# EAGLE board QuadFCv1 (EAGLE 6.4)
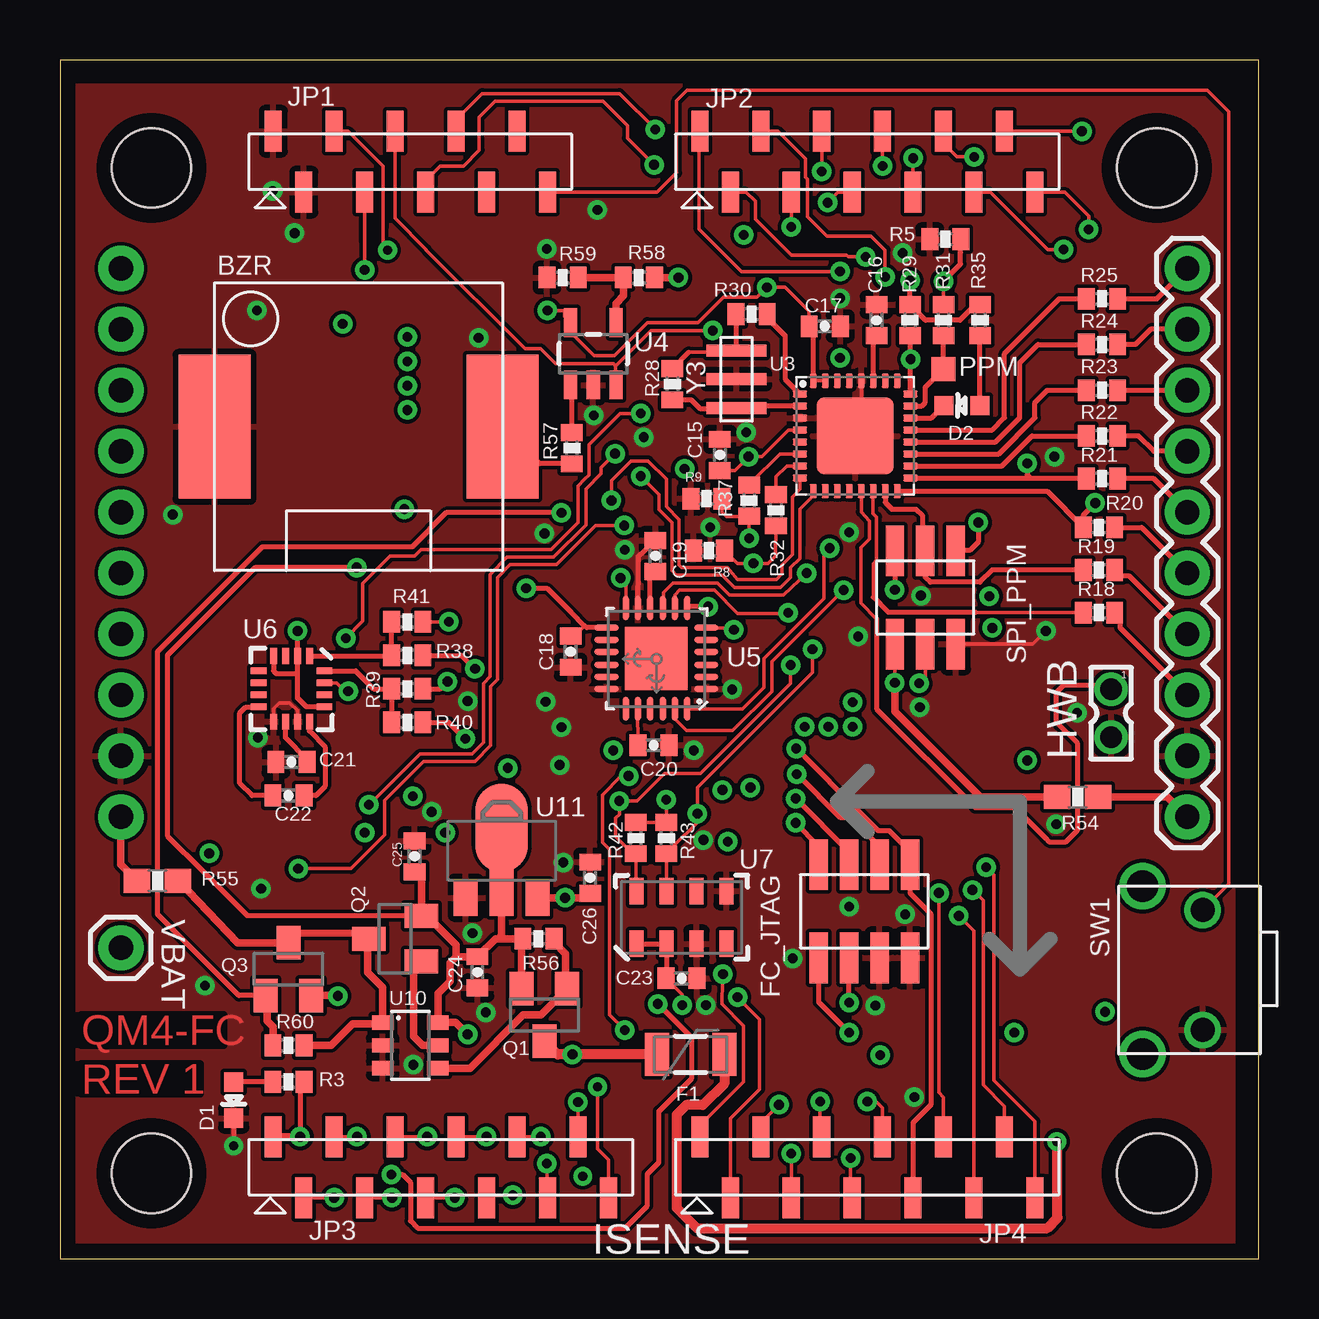
[diagram p0: board, top side]
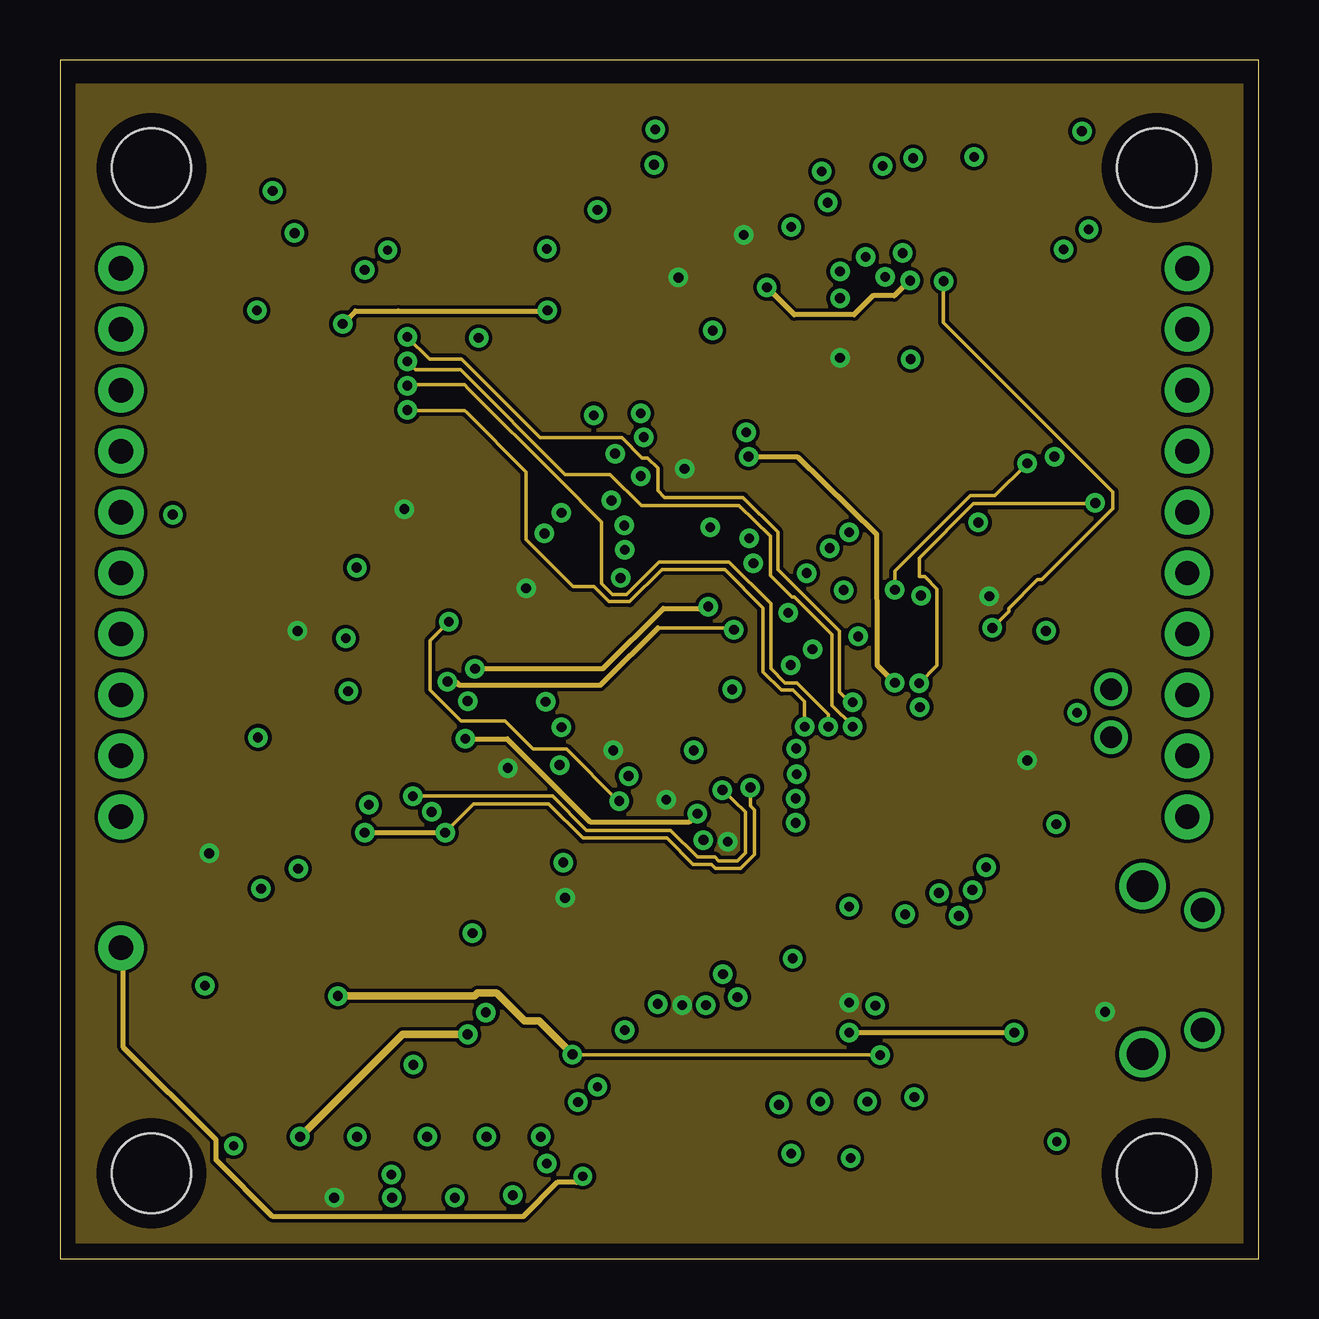
[diagram p1: board, inner layer VCC]
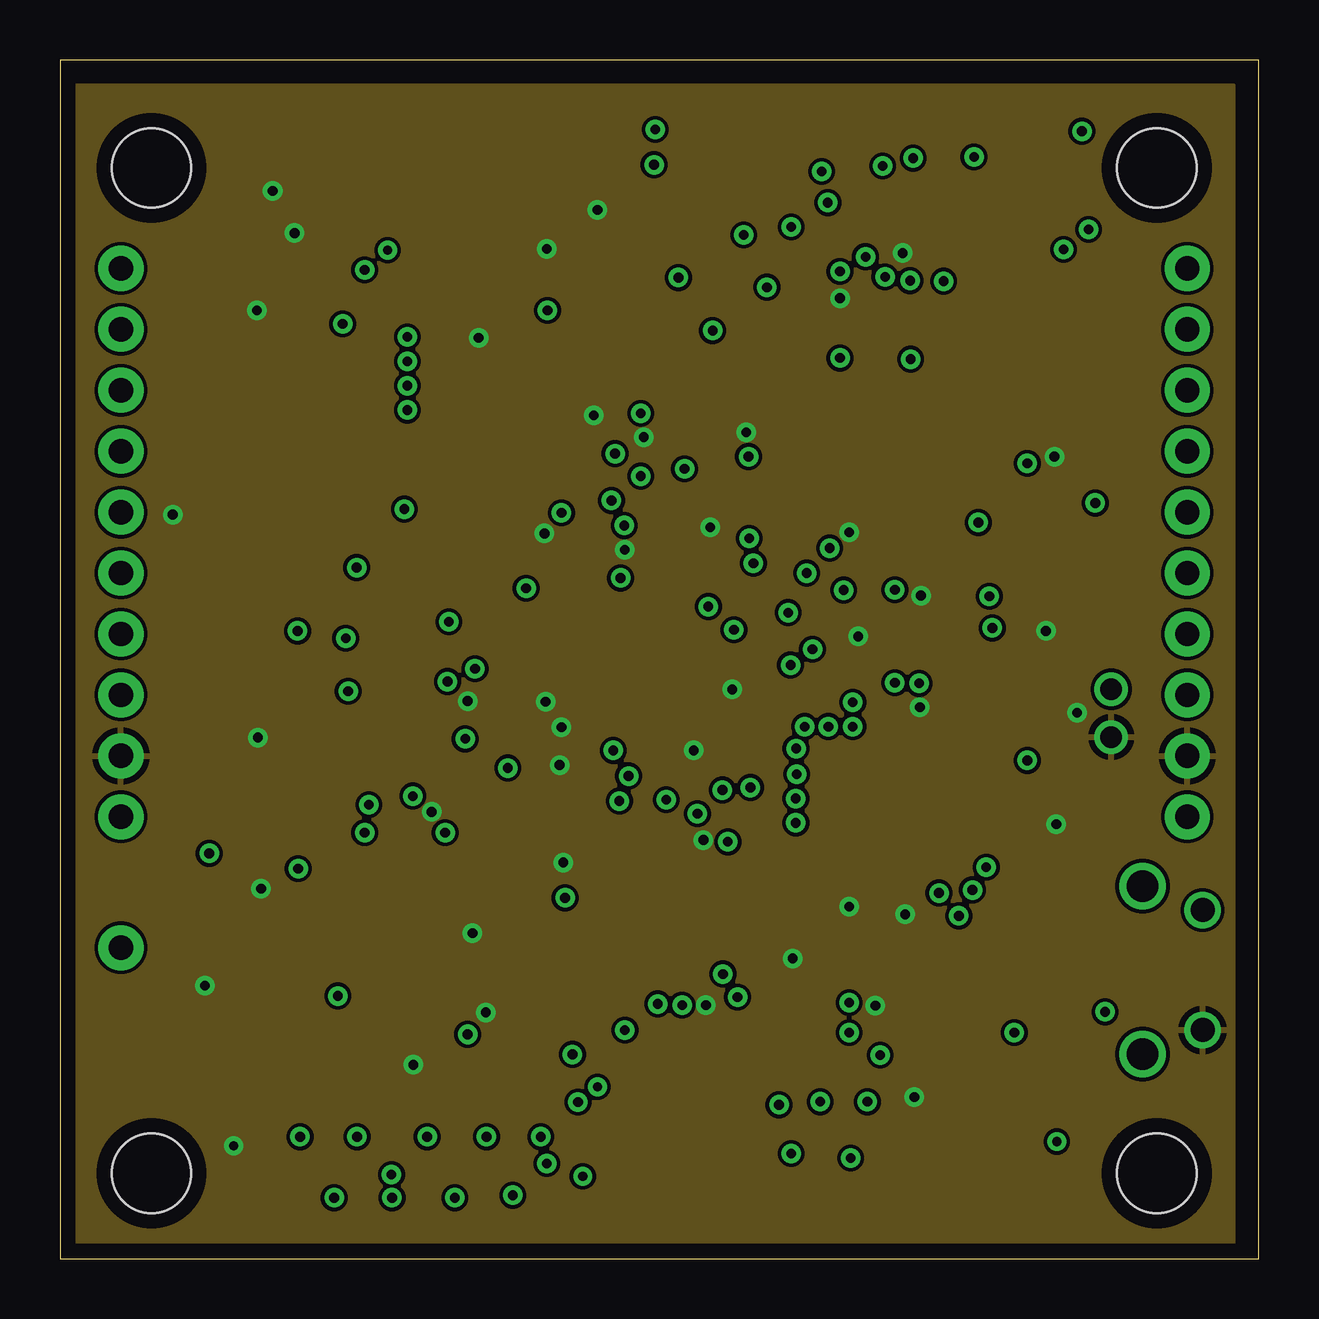
[diagram p2: board, inner layer GND]
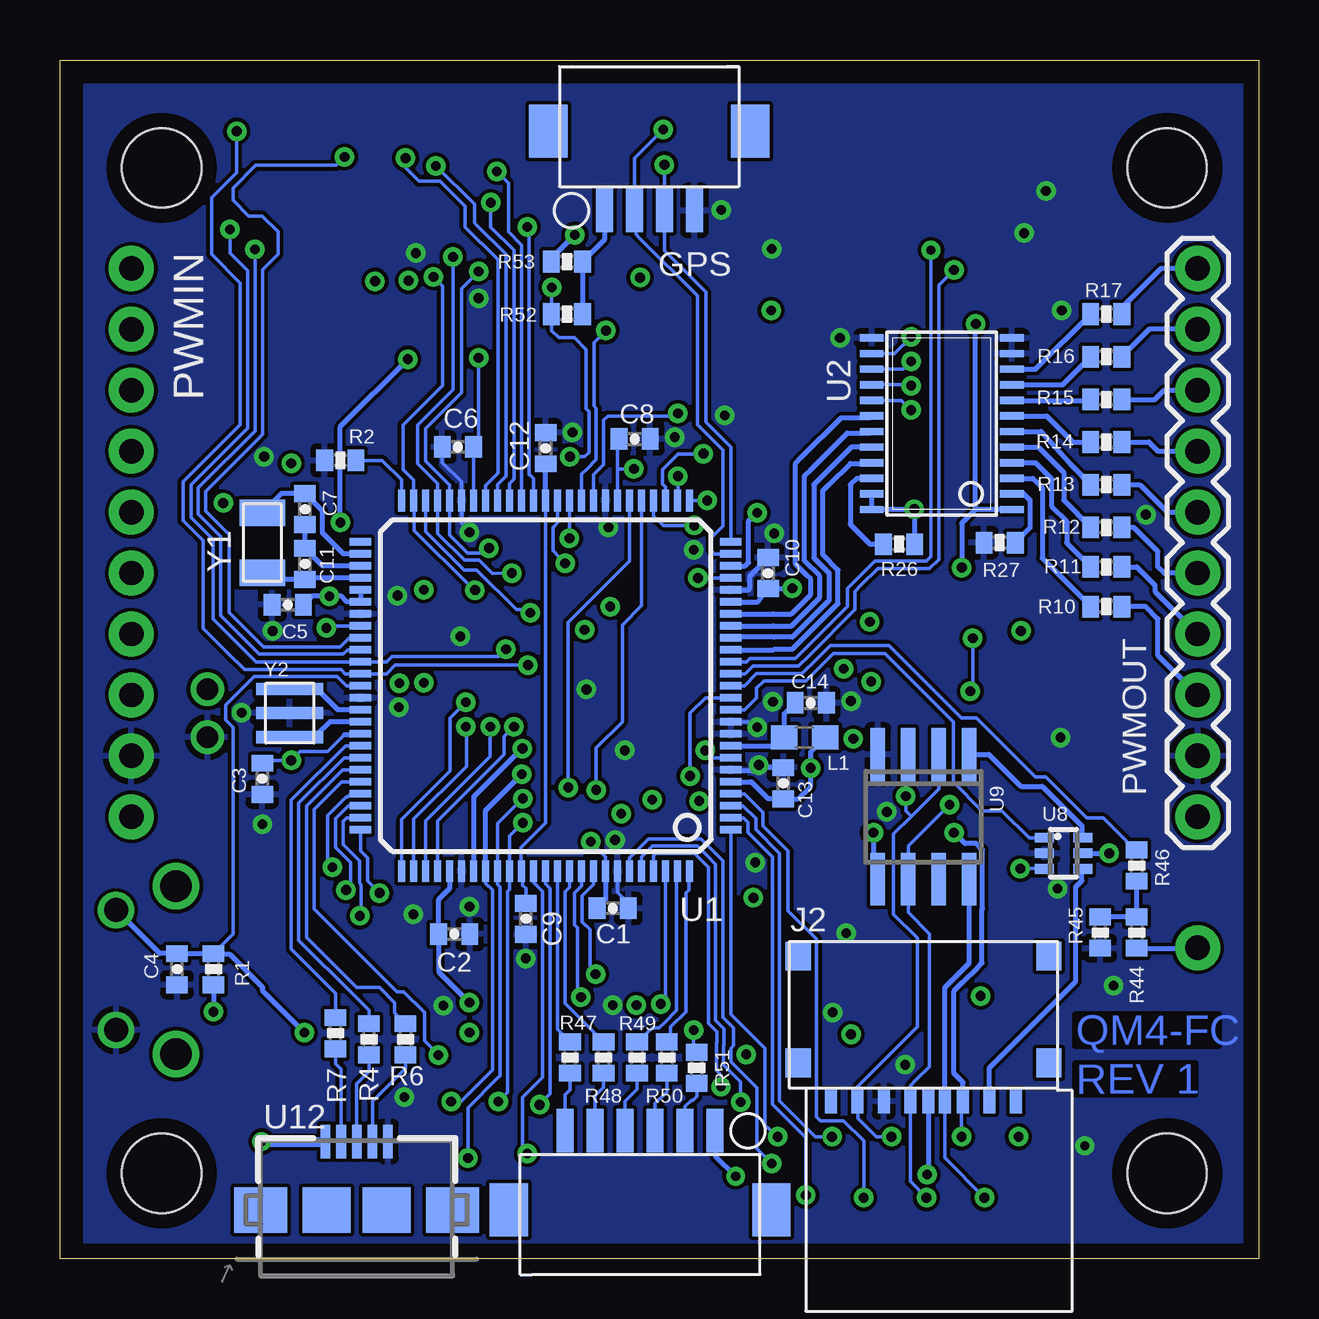
[diagram p3: board, bottom side, seen from below]

Size 49.96 x 49.96 mm. Coordinates in mm from the lower left corner, seen from the top.
Outline: 0,0 49.96,0 49.96,49.96 0,49.96 0,0
Copper layers (1*2+15*16): Top 0.035mm / dielectric 0.5mm / VCC 0.035mm / dielectric 0.5mm / GND 0.035mm / dielectric 0.5mm / Bottom 0.035mm
Design rules "default *": minimum track width 6mil, minimum drill 15mil, track to track 6mil, track to pad 6mil, pad to pad 6mil, via to via 6mil, smd to smd 6mil, copper to edge 25mil, drill to drill 5mil, minimum pad ring 10mil, minimum via ring 8mil, stop-mask expansion 4mil, vias tented up to drill 16mil, thermal gap 10mil
Net classes: 0 default: width 0.152 mm, clearance 0.152 mm

## Footprints (pad centres in the part's own frame; a part is rotated, then mirrored left to right if it is on the bottom)
CMT-1203-SMT = smd 6 x 3: P$1 0,-6; P$2 0,6
0402-CAP = smd 0.7 x 0.9: 1 -0.65,0; 2 0.65,0
LED-0603 = smd 0.8 x 0.8: A 0,-0.75; C 0,0.75
PTC-1206 = smd 1 x 1.8: 1 -1.4,0; 2 1.4,0
2X4_SMT-0.05 = smd 0.762 x 2.108: 1 -1.27,1.943; 2 -1.27,-1.943; 3 0,1.943; 4 0,-1.943; 5 1.27,1.943; 6 1.27,-1.943; 7 2.54,1.943; 8 2.54,-1.943
DF13A-4P-1.25H = smd 0.7 x 1.8: P1 -1.865,0; P2 -0.615,0; P3 0.635,0; P4 1.885,0 | smd 1.6 x 2.2: PAD@1 -4.215,3.3; PAD@2 4.215,3.3
87758-0216 = drill 0.9 pad 1.27: 1 0,-1; 2 0,1
DF13A-6P-1.25H = smd 0.7 x 1.8: P1 -3.125,0; P2 -1.875,0; P3 -0.625,0; P4 0.625,0; P5 1.875,0; P6 3.125,0 | smd 1.6 x 2.2: PAD@1 -5.475,3.3; PAD@2 5.475,3.3
1050270001 = smd 0.5 x 1: G1 0.2,-6.66; P1 3.85,-6.66; P2 2.75,-6.66; P3 1.65,-6.66; P4 0.9,-6.66; P5 -0.55,-6.66; P6 -1.65,-6.66; P7 -2.75,-6.66; P8 -3.85,-6.66 | smd 1.05 x 1.2: GND@1 -5.225,-5.05; GND@2 -5.225,-0.6; GND@3 5.225,-0.6; GND@4 5.225,-5.05
1X10_SMT-0.05 = smd 0.711 x 1.702: 1 0,1.27; 2 1.27,-1.27; 3 2.54,1.27; 4 3.81,-1.27; 5 5.08,1.27; 6 6.35,-1.27; 7 7.62,1.27; 8 8.89,-1.27; 9 10.16,1.27; 10 11.43,-1.27
1X12_SMT-0.05 = smd 0.711 x 1.702: 1 0,1.27; 2 1.27,-1.27; 3 2.54,1.27; 4 3.81,-1.27; 5 5.08,1.27; 6 6.35,-1.27; 7 7.62,1.27; 8 8.89,-1.27; 9 10.16,1.27; 10 11.43,-1.27; 11 12.7,1.27; 12 13.97,-1.27
0603 = smd 1.1 x 1: 1 -0.85,0; 2 0.85,0
TP10SQ = smd 1 x 1: TP 0,0
1X10 = drill 1.016 pad 1.88: 1 0,0; 2 2.54,0; 3 5.08,0; 4 7.62,0; 5 10.16,0; 6 12.7,0; 7 15.24,0; 8 17.78,0; 9 20.32,0; 10 22.86,0
SOT23 = smd 1 x 1.4: 1 -0.95,-1.1; 2 0.95,-1.1; 3 0,1.1
0402-RES = smd 0.7 x 0.9: 1 -0.65,0; 2 0.65,0
0603-RES = smd 1.1 x 1: 1 -0.85,0; 2 0.85,0
2X3_SMT-0.05 = smd 0.762 x 2.108: 1 -1.27,1.943; 2 -1.27,-1.943; 3 0,1.943; 4 0,-1.943; 5 1.27,1.943; 6 1.27,-1.943
STAND-OFF = hole 3.302: 0,0
PTS635VL31 = drill 1: 1 0,0; 2 5,0 | drill 1.3: SNAP1 -1,2.5; SNAP2 6,2.5
LQFP100 = smd 0.9 x 0.3: 1 -7.72,6; 2 -7.72,5.5; 3 -7.72,5; 4 -7.72,4.5; 5 -7.72,4; 6 -7.72,3.5; 7 -7.72,3; 8 -7.72,2.5; 9 -7.72,2; 10 -7.72,1.5; 11 -7.72,1; 12 -7.72,0.5; 13 -7.72,0; 14 -7.72,-0.5; 15 -7.72,-1; 16 -7.72,-1.5; 17 -7.72,-2; 18 -7.72,-2.5; 19 -7.72,-3; 20 -7.72,-3.5; 21 -7.72,-4; 22 -7.72,-4.5; 23 -7.72,-5; 24 -7.72,-5.5; 25 -7.72,-6; 51 7.72,-6; 52 7.72,-5.5; 53 7.72,-5; 54 7.72,-4.5; 55 7.72,-4; 56 7.72,-3.5; 57 7.72,-3; 58 7.72,-2.5; 59 7.72,-2; 60 7.72,-1.5; 61 7.72,-1; 62 7.72,-0.5; 63 7.72,0; 64 7.72,0.5; 65 7.72,1; 66 7.72,1.5; 67 7.72,2; 68 7.72,2.5; 69 7.72,3; 70 7.72,3.5; 71 7.72,4; 72 7.72,4.5; 73 7.72,5; 74 7.72,5.5; 75 7.72,6 | smd 0.3 x 0.9: 26 -6,-7.72; 27 -5.5,-7.72; 28 -5,-7.72; 29 -4.5,-7.72; 30 -4,-7.72; 31 -3.5,-7.72; 32 -3,-7.72; 33 -2.5,-7.72; 34 -2,-7.72; 35 -1.5,-7.72; 36 -1,-7.72; 37 -0.5,-7.72; 38 0,-7.72; 39 0.5,-7.72; 40 1,-7.72; 41 1.5,-7.72; 42 2,-7.72; 43 2.5,-7.72; 44 3,-7.72; 45 3.5,-7.72; 46 4,-7.72; 47 4.5,-7.72; 48 5,-7.72; 49 5.5,-7.72; 50 6,-7.72; 76 6,7.72; 77 5.5,7.72; 78 5,7.72; 79 4.5,7.72; 80 4,7.72; 81 3.5,7.72; 82 3,7.72; 83 2.5,7.72; 84 2,7.72; 85 1.5,7.72; 86 1,7.72; 87 0.5,7.72; 88 0,7.72; 89 -0.5,7.72; 90 -1,7.72; 91 -1.5,7.72; 92 -2,7.72; 93 -2.5,7.72; 94 -3,7.72; 95 -3.5,7.72; 96 -4,7.72; 97 -4.5,7.72; 98 -5,7.72; 99 -5.5,7.72; 100 -6,7.72
TSSOP24 = smd 0.305 x 0.991: 1 -3.575,-2.918; 2 -2.925,-2.918; 3 -2.275,-2.918; 4 -1.625,-2.918; 5 -0.975,-2.918; 6 -0.325,-2.918; 7 0.325,-2.918; 8 0.975,-2.918; 9 1.625,-2.918; 10 2.275,-2.918; 11 2.925,-2.918; 12 3.575,-2.918; 13 3.575,2.918; 14 2.925,2.918; 15 2.275,2.918; 16 1.625,2.918; 17 0.975,2.918; 18 0.325,2.918; 19 -0.325,2.918; 20 -0.975,2.918; 21 -1.625,2.918; 22 -2.275,2.918; 23 -2.925,2.918; 24 -3.575,2.918
QFN32 = smd 0.6 x 0.3: 1 -2.3,1.75; 2 -2.3,1.25; 3 -2.3,0.75; 4 -2.3,0.25; 5 -2.3,-0.25; 6 -2.3,-0.75; 7 -2.3,-1.25; 8 -2.3,-1.75; 17 2.3,-1.75; 18 2.3,-1.25; 19 2.3,-0.75; 20 2.3,-0.25; 21 2.3,0.25; 22 2.3,0.75; 23 2.3,1.25; 24 2.3,1.75 | smd 0.3 x 0.6: 9 -1.75,-2.3; 10 -1.25,-2.3; 11 -0.75,-2.3; 12 -0.25,-2.3; 13 0.25,-2.3; 14 0.75,-2.3; 15 1.25,-2.3; 16 1.75,-2.3; 25 1.75,2.3; 26 1.25,2.3; 27 0.75,2.3; 28 0.25,2.3; 29 -0.25,2.3; 30 -0.75,2.3; 31 -1.25,2.3; 32 -1.75,2.3 | smd 3.2 x 3.2: EXP 0,0
SOT23-5 = smd 0.55 x 1.2: 1 -0.95,-1.3; 2 0,-1.3; 3 0.95,-1.3; 4 0.95,1.3; 5 -0.95,1.3
QFN-24-4MM2 = smd 1.016 x 0.254: 1 -2.066,1.257; 2 -2.066,0.75; 3 -2.066,0.247; 4 -2.066,-0.287; 5 -2.066,-0.792; 6 -2.066,-1.297; 13 2.086,-1.297; 14 2.086,-0.792; 15 2.086,-0.287; 16 2.086,0.247; 17 2.086,0.75; 18 2.086,1.257 | smd 0.254 x 1.016: 7 -1.267,-2.122; 8 -0.762,-2.122; 9 -0.258,-2.122; 10 0.278,-2.122; 11 0.78,-2.122; 12 1.287,-2.122; 19 1.287,2.082; 20 0.78,2.082; 21 0.278,2.082; 22 -0.258,2.082; 23 -0.762,2.082; 24 -1.267,2.082 | smd 2.616 x 2.616: P$1 0.02,-0.01
16LPCC = smd 0.65 x 0.28: 1 -1.37,0.75; 2 -1.37,0.25; 3 -1.37,-0.25; 4 -1.37,-0.75; 9 1.37,-0.75; 10 1.37,-0.25; 11 1.37,0.25; 12 1.37,0.75 | smd 0.28 x 0.65: 5 -0.75,-1.37; 6 -0.25,-1.37; 7 0.25,-1.37; 8 0.75,-1.37; 13 0.75,1.37; 14 0.25,1.37; 15 -0.25,1.37; 16 -0.75,1.37
MS5611-01BA = smd 1.1 x 0.6: 1 -1.1,1.875; 2 -1.1,0.625; 3 -1.1,-0.625; 4 -1.1,-1.875; 5 1.1,-1.875; 6 1.1,-0.625; 7 1.1,0.625; 8 1.1,1.875
SOT363_PHILIPS = smd 0.4 x 0.8: 1 -0.65,-0.8; 2 0,-0.8; 3 0.65,-0.8; 4 0.65,0.8; 5 0,0.8; 6 -0.65,0.8
SOIC8 = smd 0.6 x 2.2: 1 -1.905,-2.6; 2 -0.635,-2.6; 3 0.635,-2.6; 4 1.905,-2.6; 5 1.905,2.6; 6 0.635,2.6; 7 -0.635,2.6; 8 -1.905,2.6
SOT23-6 = smd 0.6 x 0.9: 1 -0.95,-1.15; 2 0,-1.15; 3 0.95,-1.15; 4 0.95,1.15; 5 0,1.15; 6 -0.95,1.15
SOT89 = smd 1 x 1.5: 1 -1.499,-1.981; 3 1.499,-1.981 | smd 1 x 2: 2 0,-1.727 | smd 2.2 x 3.7: 2@1 0,0.94
USB-AB-MICRO-SMD = smd 1.4 x 0.4: D+ 2.85,0; D- 2.85,0.65; GND 2.85,-1.3; ID 2.85,-0.65; VBUS 2.85,1.3 | smd 1.9 x 2: P$6 0,1.25; P$7 0,-1.25 | smd 1.9 x 2.2: P$8 0,4; P$9 0,-4
1X01 = drill 1.016 pad 1.88: 1 0,0
ECS-.327-12.5-34B = smd 1.1 x 1.9: P$1 -1.25,0; P$2 1.25,0
AWSCR-CW = smd 0.5 x 2.8: P$1 -1,0; P$2 0,0 | smd 0.511 x 2.8: P$3 1,0
PRQC16.00SR5010X000 = smd 0.5 x 2.5: 1 -1.2,0; 2 0,0; 3 1.2,0

## Placement (x,y rotation side)
BZR  CMT-1203-SMT  [CMT-1203-SMT]  12.45,34.67 90 top
C1  0.1uF  [0402-CAP]  26.92,14.61 0 bottom
C2  0.1uF  [0402-CAP]  33.53,13.53 0 bottom
C3  0.1uF  [0402-CAP]  41.53,20 270 bottom
C4  0.1uF  [0402-CAP]  45.09,12.06 270 bottom
C5  0.1uF  [0402-CAP]  40.46,27.25 180 bottom
C6  0.1uF  [0402-CAP]  33.38,33.83 180 bottom
C7  18pF  [0402-CAP]  39.75,31.24 270 bottom
C8  0.1uF  [0402-CAP]  26.01,34.16 0 bottom
C9  1.8uF  [0402-CAP]  30.54,14.16 270 bottom
C10  0.1uF  [0402-CAP]  20.45,28.57 90 bottom
C11  18pF  [0402-CAP]  39.75,28.96 90 bottom
C12  1.8uF  [0402-CAP]  29.72,33.78 90 bottom
C13  1uF  [0402-CAP]  19.81,19.81 90 bottom
C14  1uF  [0402-CAP]  18.67,23.16 180 bottom
C15  .1uF  [0402-CAP]  27.51,33.5 90 top
C16  1uF  [0402-CAP]  34.04,39.12 90 top
C17  .1uF  [0402-CAP]  31.88,38.86 0 top
C18  0.1uF  [0402-CAP]  21.29,25.3 270 top
C19  0.1uF  [0402-CAP]  24.82,29.29 90 top
C20  2.2nF  [0402-CAP]  24.74,21.4 0 top
C21  4.7uF  [0402-CAP]  9.65,20.7 180 top
C22  0.22uF  [0402-CAP]  9.53,19.3 0 top
C23  0.1uF  [0402-CAP]  25.91,11.68 0 top
C24  1uF  [0402-CAP]  17.4,11.94 90 top
C25  1uF  [0402-CAP]  14.78,16.76 90 top
C26  1uF  [0402-CAP]  22.1,15.88 90 top
D1  GREEN  [LED-0603]  7.24,6.6 180 top
D2  GREEN  [LED-0603]  37.59,35.56 90 top
F1  500mA  [PTC-1206]  26.29,8.51 0 top
FC_JTAG  M04X2SMT-0.05  [2X4_SMT-0.05]  32.89,14.48 0 top
GPS  [DF13A-4P-1.25H]  25.4,43.69 0 bottom
HWB  HWB  [87758-0216]  43.81,22.73 180 top
ISENSE  [DF13A-6P-1.25H]  25.78,5.33 180 bottom
J2  1050270001  [1050270001]  13.97,13.21 0 bottom
JP1  M101X10-SMT-0.05  [1X10_SMT-0.05]  8.89,45.72 0 top
JP2  M12  [1X12_SMT-0.05]  26.67,45.72 0 top
JP3  M12  [1X12_SMT-0.05]  8.89,3.81 0 top
JP4  M12  [1X12_SMT-0.05]  26.67,3.81 0 top
L1  10uH  [0603]  18.92,21.72 0 bottom
PPM  TESTPAD_TPSQTP10SQ  [TP10SQ]  36.83,37.08 90 top
PWMIN  M10"  [1X10]  46.99,18.41 90 top
PWMOUT  M10"  [1X10]  2.54,18.41 90 bottom
Q1  DMP2035U  [SOT23]  20.19,10.16 180 top
Q2  DMP2035U  [SOT23]  13.97,13.34 90 top
Q3  DMP2035U  [SOT23]  9.53,12.06 0 top
R1  10K  [0402-RES]  43.56,12.06 270 bottom
R2  10K  [0402-RES]  38.28,33.27 180 bottom
R3  1k  [0402-RES]  9.53,7.37 180 top
R4  22  [0402-RES]  37.08,9.14 270 bottom
R5  20K  [0402-RES]  36.91,42.49 180 top
R6  0  [0402-RES]  35.56,9.14 270 bottom
R7  22  [0402-RES]  38.48,9.4 270 bottom
R8  20k  [0402-RES]  27.05,29.51 180 top
R9  20k  [0402-RES]  26.95,31.67 0 top
R10  220  [0402-RES]  6.35,27.18 0 bottom
R11  220  [0402-RES]  6.35,28.83 0 bottom
R12  220  [0402-RES]  6.35,30.48 0 bottom
R13  220  [0402-RES]  6.35,32.26 0 bottom
R14  220  [0402-RES]  6.35,34.04 0 bottom
R15  220  [0402-RES]  6.35,35.81 0 bottom
R16  220  [0402-RES]  6.35,37.59 0 bottom
R17  220  [0402-RES]  6.35,39.37 0 bottom
R18  220  [0402-RES]  43.31,26.92 0 top
R19  220  [0402-RES]  43.31,28.7 0 top
R20  220  [0402-RES]  43.31,30.48 0 top
R21  220  [0402-RES]  43.43,32.51 0 top
R22  220  [0402-RES]  43.43,34.29 0 top
R23  220  [0402-RES]  43.43,36.2 0 top
R24  220  [0402-RES]  43.43,38.1 0 top
R25  220  [0402-RES]  43.43,40.01 0 top
R26  49.9K  [0402-RES]  14.99,29.78 0 bottom
R27  10K  [0402-RES]  10.79,29.84 0 bottom
R28  1M  [0402-RES]  25.53,36.45 90 top
R29  10K  [0402-RES]  35.43,39.12 90 top
R30  27  [0402-RES]  28.83,39.37 0 top
R31  10K  [0402-RES]  36.83,39.12 270 top
R32  10k  [0402-RES]  29.84,31.19 90 top
R35  1k  [0402-RES]  38.35,39.12 270 top
R37  10k  [0402-RES]  28.73,31.6 90 top
R38  DNP  [0402-RES]  14.48,25.15 0 top
R39  DNP  [0402-RES]  14.48,23.75 0 top
R40  0  [0402-RES]  14.48,22.35 0 top
R41  0  [0402-RES]  14.48,26.54 0 top
R42  2.2k  [0402-RES]  24,17.53 90 top
R43  2.2k  [0402-RES]  25.27,17.53 90 top
R44  120K  [0402-RES]  5.08,13.59 270 bottom
R45  20K  [0402-RES]  6.6,13.59 90 bottom
R46  10k  [0402-RES]  5.08,16.38 90 bottom
R47  10k  [0402-RES]  28.7,8.38 90 bottom
R48  10k  [0402-RES]  27.3,8.38 90 bottom
R49  10k  [0402-RES]  25.91,8.38 90 bottom
R50  10k  [0402-RES]  24.66,8.38 90 bottom
R51  10k  [0402-RES]  23.42,7.95 90 bottom
R52  0  [0402-RES]  28.83,39.37 180 bottom
R53  DNP  [0402-RES]  28.83,41.55 180 bottom
R54  0  [0603-RES]  42.42,19.24 180 top
R55  0  [0603-RES]  4.06,15.75 0 top
R56  470K  [0402-RES]  19.94,13.34 180 top
R57  0  [0402-RES]  21.34,33.78 270 top
R58  10K  [0402-RES]  24.13,40.89 0 top
R59  10K  [0402-RES]  20.95,40.89 0 top
R60  100k  [0402-RES]  9.53,8.89 0 top
SPI_PPM  SPI_PPM  [2X3_SMT-0.05]  36.07,27.56 0 top
STANDOFF1  STAND-OFF  [STAND-OFF]  3.81,3.56 0 top
STANDOFF2  STAND-OFF  [STAND-OFF]  3.81,45.47 0 top
STANDOFF3  STAND-OFF  [STAND-OFF]  45.72,3.56 0 top
STANDOFF4  STAND-OFF  [STAND-OFF]  45.72,45.47 0 top
SW1  PTS635VL31-VERT  [PTS635VL31]  47.62,9.53 90 top
U1  TM4C123GH6PZ  [LQFP100]  29.72,23.88 180 bottom
U2  74LVC4245APW  [TSSOP24]  13.21,34.8 90 bottom
U3  ATMEGA32U2-MU  [QFN32]  33.15,34.29 0 top
U4  MCP6L91T-E/OT  [SOT23-5]  22.23,37.72 0 top
U5  INVESENSE_MPU-6000  [QFN-24-4MM2]  24.87,25 180 top
U6  HMC5883LSMD  [16LPCC]  9.65,23.75 270 top
U7  MS5611-01BA  [MS5611-01BA]  25.91,14.22 90 top
U8  74AUP1G19GW  [SOT363_PHILIPS]  8.13,16.89 270 bottom
U9  S25FL127S  [SOIC8]  13.97,18.41 180 bottom
U10  LTC4412  [SOT23-6]  14.61,8.89 270 top
U11  AP7215-33YG-13  [SOT89]  18.41,17.02 0 top
U12  [USB-AB-MICRO-SMD]  37.59,2.03 90 bottom
VBATTSENSE  M01PTH  [1X01]  2.54,12.95 90 top
Y1  32.768KHZ  [ECS-.327-12.5-34B]  41.53,29.84 270 bottom
Y2  AWSCR-20.00CW-T  [AWSCR-CW]  40.39,22.73 270 bottom
Y3  PRQC16.00SR5010X000  [PRQC16.00SR5010X000]  28.19,36.65 90 top

## Library data of the parts
BZR C1-C26 D1 D2 F1 FC_JTAG GPS ISENSE J2 JP1-JP4 L1 PPM PWMIN PWMOUT Q1-Q3 R1-R32 R35 R37-R60 SPI_PPM STANDOFF1-STANDOFF4 SW1 U1-U6 U8-U12 VBATTSENSE Y1-Y3 = QuadFCv1
HWB = QuadFCv1; MPN: 87758-0216; OC_FARNELL: unknown; OC_NEWARK: 94M1513
U7 = QuadFCv1; DATASHEET: http://www.meas-spec.com/downloads/MS5611-01BA01.pdf; LINK: http://www.meas-spec.com/product/t_product.aspx?id=8503#; MFGPN: MS5611-01BA

## Nets
3.3V: C1.1 C2.1 C3.1 C5.1 C6.1 C8.1 C10.1 C13.1 C18.1 C23.1 C26.1 FC_JTAG.4 J2.P4 JP3.2 L1.2 R1.2 R26.2 R42.2 R43.2 R53.2 R58.2 U1.5 U1.7 U1.20 U1.32 U1.44 U1.55 U1.56 U1.67 U1.80 U1.93 U2.23 U2.24 U5.13 U6.2 U6.4 U6.13 U7.1 U7.2 U8.5 U9.8 U11.3
5V: C15.1 C17.1 C24.2 C25.1 JP3.1 Q1.2 Q2.2 R3.1 R29.2 R35.1 R52.2 R54.2 R56.2 SPI_PPM.2 U2.1 U3.4 U3.31 U3.32 U4.5 U10.6 U11.2 U11.2@1
5VBATT: Q2.3 Q3.3 R55.2 R60.2 U10.1
AUX_SCL: R38.2 U5.7
AUX_SDA: R39.2 U5.6
BUZZER_PWM: JP1.5 U1.35 U4.3
FC_IMU_CS_L: U1.48 U5.8
FC_IMU_INT: U1.22 U5.12
FC_IMU_MISO: JP2.2 U1.47 U5.9
FC_IMU_MOSI: JP2.1 U1.46 U5.24
FC_IMU_SCLK: JP2.3 U1.49 U5.23
FC_JTAG_TCK: FC_JTAG.1 JP4.5 U1.85
FC_JTAG_TDI: FC_JTAG.5 JP4.7 U1.83
FC_JTAG_TDO: FC_JTAG.7 JP4.8 U1.82
FC_JTAG_TMS: FC_JTAG.3 JP4.6 U1.84
FC_MAG_DRDY_L: U1.34 U6.15
FC_MEM_CLK: J2.P5 JP3.4 U1.28 U9.6
FC_MEM_FSS: U1.29 U8.3
FC_MEM_MISO: J2.P7 JP3.5 U1.30 U9.2
FC_MEM_MOSI: J2.P3 JP3.3 U1.31 U9.5
FC_MEM_SEL: U1.11 U8.1
FC_PB2: JP4.12 U1.72
FC_PB3: JP4.11 U1.73
FC_PB4: JP4.1 U1.92
FC_PB5: JP4.2 U1.91
FC_PD0: JP3.9 U1.1
FC_PD1: JP3.8 U1.2
FC_PD2: JP3.7 U1.3
FC_PD3: JP3.6 U1.4
FC_PD4: JP3.12 U1.97
FC_PE4: JP3.10 U1.95
FC_PE5: JP3.11 U1.96
FC_PF0: JP2.5 U1.40
FC_PF1: JP2.6 U1.41
FC_PF2: JP2.7 U1.42
FC_PF3: JP2.8 U1.43
FC_PF4: JP2.4 U1.39
FC_PG2: JP2.10 U1.60
FC_PG3: JP2.9 U1.59
FC_PG4: JP4.10 U1.74
FC_PG5: JP4.9 U1.75
FC_PG6: JP4.4 U1.87
FC_PG7: JP4.3 U1.88
FC_PPM_IN: R5.1 R31.1 U1.58
FC_PPM_STATUS0: R9.2 R37.1 U1.36
FC_PPM_STATUS1: R8.1 R32.1 U1.37
FC_PWMOUT1: U1.16 U2.21
FC_PWMOUT2: U1.17 U2.20
FC_PWMOUT3: U1.18 U2.19
FC_PWMOUT4: U1.19 U2.18
FC_PWMOUT5: U1.79 U2.17
FC_PWMOUT6: U1.78 U2.16
FC_PWMOUT7: U1.77 U2.15
FC_PWMOUT8: U1.76 U2.14
FC_PWMOUT_ARM_L: R26.1 U2.22
FC_RESET_L: C4.1 FC_JTAG.2 JP1.10 R1.1 SW1.2 U1.63
FC_SD_PRESENT: J2.G1 U1.98
FC_SENSE_SCL: JP2.11 R41.2 R42.1 U1.62 U7.8
FC_SENSE_SDA: JP2.12 R40.2 R43.1 U1.61 U7.7
FC_USB0DM: R7.1 U1.68
FC_USB0DP: R4.1 U1.69
FC_USB0ID: R6.1 U1.70
FLASH_CS_L: U8.6 U9.1
GND: BZR.P$2 C1.2 C2.2 C3.2 C4.2 C5.2 C6.2 C8.2 C9.2 C10.2 C12.2 C13.2 C14.1 C15.2 C16.2 C17.2 C18.2 C19.2 C20.2 C21.2 C23.2 C24.1 C25.2 C26.2 D1.C FC_JTAG.6 FC_JTAG.8 GPS.P4 HWB.2 J2.P6 JP1.1 JP1.2 PWMIN.2 PWMOUT.2 R2.2 R5.2 R8.2 R9.1 R27.1 R45.1 R59.1 SPI_PPM.6 SW1.1 U1.6 U1.9 U1.10 U1.21 U1.33 U1.45 U1.57 U1.64 U1.81 U1.94 U2.11 U2.12 U2.13 U3.3 U3.28 U3.EXP U4.2 U5.1 U5.11 U5.18 U6.9 U6.11 U7.3 U7.5 U8.2 U9.4 U10.2 U10.3 U11.1 U12.GND Y2.P$2 Y3.2
GNDX: C7.2 C11.2 U1.53
GPS_RX: GPS.P3 JP1.6 U1.25
GPS_TX: GPS.P2 JP1.7 U1.24
ISENSE1: R48.2 U1.90
ISENSE2: R47.2 U1.89
ISENSE3: R51.2 U1.12
ISENSE4: R50.2 U1.100
ISENSE5V: R49.2 U1.99
MAG_SCL: R38.1 R41.1 U6.1
MAG_SDA: R39.1 R40.1 U6.16
N$1: PWMIN.3 R18.2
N$2: PWMIN.4 R19.2
N$3: PWMIN.5 R20.2
N$4: PWMIN.6 R21.2
N$5: PWMIN.7 R22.2
N$6: PWMIN.8 R23.2
N$7: PWMIN.9 R24.2
N$8: PWMIN.10 R25.2
N$9: PWMOUT.3 R10.2
N$10: PWMOUT.4 R11.2
N$11: PWMOUT.5 R12.2
N$12: PWMOUT.6 R13.2
N$13: PWMOUT.7 R14.2
N$14: PWMOUT.8 R15.2
N$15: PWMOUT.9 R16.2
N$16: PWMOUT.10 R17.2
N$17: C14.2 L1.1 U1.8
N$18: C9.1 C12.1 U1.38 U1.86
N$19: C11.1 U1.54 Y1.P$2
N$20: R27.2 U2.2
N$21: C7.1 U1.52 Y1.P$1
N$22: R2.1 U1.50
N$23: PWMIN.1 R54.1
N$24: U1.65 Y2.P$1
N$25: U1.66 Y2.P$3
N$26: PWMOUT.1 R55.1
N$27: R6.2 U12.ID
N$28: D1.A R3.2
N$29: R4.2 U12.D+
N$30: ISENSE.P6 R47.1
N$31: ISENSE.P5 R48.1
N$32: D2.A R35.2
N$33: C20.1 U5.20
N$34: C19.1 U5.10
N$35: C21.1 U6.10
N$36: C22.1 U6.8
N$37: C22.2 U6.12
N$38: R44.1 R45.2 R46.1
N$39: GPS.P1 R52.1 R53.1
N$40: R57.1 U4.1
N$41: Q2.1 U10.5
N$42: BZR.P$1 R57.2
N$43: R58.1 R59.2 U4.4
N$44: ISENSE.P4 R49.1
N$45: ISENSE.P3 R50.1
N$46: ISENSE.P2 R51.1
N$49: R7.2 U12.D-
PC7_LED: D2.C U3.22
PPM_HWB: HWB.1 U3.13
PPM_OUT: PPM.TP R31.2 U3.23
PPM_PD0: R37.2 U3.6
PPM_PD1: R32.2 U3.7
PPM_RST: R29.1 SPI_PPM.5 U3.24
PPM_RX: U1.26 U3.8
PPM_TX: U1.27 U3.9
PWMIN1: R18.1 U3.14
PWMIN2: R19.1 SPI_PPM.3 U3.15
PWMIN3: R20.1 SPI_PPM.4 U3.16
PWMIN4: R21.1 SPI_PPM.1 U3.17
PWMIN5: R22.1 U3.18
PWMIN6: R23.1 U3.19
PWMIN7: R24.1 U3.20
PWMIN8: R25.1 U3.21
PWMOUT1: R10.1 U2.3
PWMOUT2: R11.1 U2.4
PWMOUT3: R12.1 U2.5
PWMOUT4: R13.1 U2.6
PWMOUT5: R14.1 U2.7
PWMOUT6: R15.1 U2.8
PWMOUT7: R16.1 U2.9
PWMOUT8: R17.1 U2.10
RADIO_RX: JP1.3 U1.15
RADIO_TX: JP1.4 U1.14
SD_CS_L: J2.P2 U8.4
USB_EPEN: Q3.1 R60.1 U1.23
USB_POWER_CONN_L: Q1.1 R56.1 U10.4
VBATT: ISENSE.P1 R44.2 VBATTSENSE.1
VBATTSENSE: R46.2 U1.13
VUCAP: C16.1 U3.27
VUSB: F1.2 U12.VBUS
VUSB_F: F1.1 Q1.3 Q3.2 U1.71
XT1: R28.2 R30.1 Y3.3
XT1R: R30.2 U3.1
XT2: R28.1 U3.2 Y3.1

## Tracks (layer width: path | path; a pad name or v marks a point on that pad's centre or on a via)
3.3V  (via drill 0.41)
  Top 0.152: JP3.2 v11.43,2.54 | v25.93,10.57 25.93,11.01 C23.1 | R42.2 R43.2 v25.27,19.13 | C18.1 21.45,25.95 21.88,26.37
  Top 0.203: U5.13 21.95,26.3 21.88,26.37 21.32,26.93 20.32,27.93 19.45,27.93 v19.43,27.94 | v32.89,10.67 FC_JTAG.4 | 21.91,15.04 C26.1 | U6.13 10.28,23 9.91,23.37 9.91,24.38 | 9.91,24.38 U6.2 v9.9,26.16 v9.91,26.16 | U6.4 8.9,24.5 9.02,24.38 9.91,24.38 | v21.06,15.04 21.16,14.99 21.21,15.04 | U7.1 U7.2 25.28,12.34 C23.1
  Top 0.305: R58.2 v25.78,40.89 | U11.3 21.21,15.04 21.91,15.04
  Bottom 0.152: v11.43,2.54 13.08,4.19 13.08,6.54 J2.P4 | 38.1,21.84 38.8,21.14 39.94,21.14 v40.32,20.77 41.42,20.77 C3.1 | U1.93 27.22,16.75 v27.84,17.37 | U1.7 22.76,20.88 v23.06,21.18 | U1.44 32.72,33.83 C6.1 32.51,34.05 v32.51,37.54 | U1.32 26.72,32.92 | 26.72,32.92 26.72,34.13 C8.1 | v26.04,32.92 26.72,32.92
  Bottom 0.203: R26.2 14.34,31.04 14.33,31.22 14.37,31.22 | 14.37,31.22 v14.35,31.24 | U2.23 U2.24 14.37,31.22 | 38.1,21.84 37.47,21.84 U1.67 | R1.2 v43.56,10.29 | R53.2 29.48,41.69 v28.5,42.67 | U1.20 20.87,27.38 C10.1 19.45,27.93 v19.43,27.94 | U1.5 21.15,19.88 20.45,19.18 19.83,19.18 C13.1 19.19,19.16 18.67,19.68 v18.67,20.45 18.67,21.12 L1.2 | U1.80 33.72,15.43 33.78,15.37 34.18,14.97 C2.1 34.18,11.95 v32.89,10.67 | U1.93 27.22,14.96 C1.1 27.57,14.37 | v9.91,26.16 10.03,26.16 | U8.5 v6.22,16.89 | J2.P4 13.07,11.31 12.06,12.32 U9.8 | U1.55 U1.56 37.99,27.38 38.23,27.61 v38.73,27.61 39.46,27.61 C5.1
  Bottom 0.305: v25.78,40.89 25.91,40.89
  pour VCC: 0.64,48.9 54.61,48.9 54.61,0.64 0.64,0.64
5V  (via drill 0.41)
  Top 0.152: SPI_PPM.2 v34.8,24 | U11.2 U11.2@1 | U4.5 | v20.32,39.52 21.03,39.52 21.03,39.26 U4.5 | C17.1 31.23,39.49 30.23,40.49 v29.46,40.49 29.06,40.08 27.66,40.08 26.59,39.01 24.49,39.01 23.95,38.48 23.11,37.64 22.25,37.64 21.27,38.62 U4.5 | U3.31 U3.32 31.34,36.54 | C15.1 28.05,32.85 28.13,32.85 v28.7,33.43 29.26,33.43 30.37,34.54 U3.4
  Top 0.203: U3.32 31.4,38.69 C17.1 | 15.07,15.83 C25.1 | v12.37,28.8 8.13,28.8 4.47,25.15 4.47,17.63 5.94,16.15 7.8,14.3 15.05,14.3 Q2.2 | R35.1 38.17,39.77 37.52,39.12 36.08,39.12 R29.2 v35.43,40.77 | R3.1 10.01,7.37 v10.01,5.08
  Top 0.305: 16.51,12.57 16.26,12.32 16.26,11.56 15.76,11.06 U10.6 16.5,9.84 v16.99,9.35 | 16.51,12.57 17.38,12.57 C24.2 18.15,13.34 18.29,13.34 | Q1.2 19.24,13.29 R56.2 18.29,13.34 | U11.2 18.41,13.46 18.29,13.34 | 16.51,12.57 16.51,13.08 15.31,14.29 Q2.2 15.07,15.83 | v10.01,5.08 JP3.1 | R54.2 38.37,19.24 34.8,22.81 v34.8,24
  VCC 0.203: v28.7,33.43 30.73,33.43 34.04,30.2 34.06,24.74 v34.8,24 | v11.79,38.96 12.32,39.5 14.1,39.5 20.3,39.5 v20.32,39.52 | v35.43,40.77 35.41,40.77 34.77,40.13 33.88,40.13 33.1,39.34 30.61,39.34 v29.46,40.49
  VCC 0.305: v16.99,9.35 14.28,9.35 v10.01,5.08
  Bottom 0.152: v29.46,40.49 29.48,40.47 R52.2 29.46,39.35 29.46,38.68 29.16,38.38 28.52,38.38 28.04,37.9 28.04,35.43 27.91,35.31 27.91,33.6 28.09,33.43 v28.7,33.43
  Bottom 0.203: U2.1 11.8,31.22 | 11.8,31.22 12.37,30.66 v12.37,28.8 | 11.8,31.22 11.8,38.95 v11.79,38.96
5VBATT
  Top 0.305: R60.2 11.3,8.89 12.19,9.78 13.39,9.78 U10.1 13.46,11.31 12.83,11.94 12.83,13.29 Q2.3 12.6,13.56 9.94,13.57 Q3.3 7.41,13.16 4.95,15.75 R55.2
AUX_SCL  (via drill 0.41)
  Top 0.203: R38.2 16.74,25.15 v17.3,24.59 | v27.03,27.18 26.2,27.18 U5.7
  VCC 0.203: v17.3,24.59 22.63,24.59 25.15,27.1 26.95,27.1 v27.03,27.18
AUX_SDA  (via drill 0.41)
  Top 0.152: U5.6 28.02,26.29 v28.09,26.21
  Top 0.203: R39.2 15.85,23.75 v16.15,24.05 | U5.6
  VCC 0.152: 24.92,26.29 28.02,26.29 v28.09,26.21
  VCC 0.203: 24.92,26.29 22.68,24.05 22.53,23.9 16.64,23.9 16.48,24.05 v16.15,24.05
BUZZER_PWM  (via drill 0.41)
  Top 0.152: JP1.5 13.97,43.36 15.27,42.06 15.27,42.04 19.36,37.95 19.38,37.92 20.04,37.92 20.6,37.36 20.65,37.31 23.06,37.31 23.16,37.21 | 23.16,37.21 23.16,36.43 U4.3 | v27.2,38.68 24.64,38.68 23.16,37.21
  Bottom 0.152: U1.35 28.22,32.69 27.99,32.92 27.61,33.3 27.61,35.43 27.71,35.56 27.71,38.18 v27.2,38.68
FC_IMU_CS_L  (via drill 0.41)
  Top 0.152: U5.8 25.63,27.66 25.83,27.86 27.28,27.86 28.25,26.9 30.33,26.9 v30.35,26.92
  Bottom 0.152: U1.48 34.72,30.3 33.2,28.78 33.12,28.7 32.59,28.7 30.94,27.05 30.48,27.05 v30.35,26.92
FC_IMU_INT  (via drill 0.41)
  Top 0.152: U5.12 23.59,28.15 v23.37,28.37
  Bottom 0.152: v23.37,28.37 U1.22
FC_IMU_MISO  (via drill 0.41)
  Top 0.152: v33.58,41.76 32.87,41.76 32.79,41.83 30.48,41.83 28.98,43.33 28.98,44.07 28.6,44.45 JP2.2 | v31.13,28.57 30.16,27.66 27.91,27.66 27.41,28.17 25.55,28.17 25.15,27.76 25.15,27.14 U5.9
  Bottom 0.152: v33.58,41.76 33.58,36.22 35.05,34.75 35.05,33.15 34.22,32.31 U1.47 34.22,30.23 33.1,29.11 32.49,29.11 32.41,29.03 32.33,28.96 31.94,28.56 v31.13,28.57
FC_IMU_MOSI  (via drill 0.41)
  Top 0.152: v32.51,41.15 28.4,41.15 26.64,42.9 26.64,46.97 JP2.1 | U5.24 27.02,22.92 | 27.02,22.92 27.03,22.91 | 27.02,22.92 28.46,22.92 29.34,23.8 29.34,25.02 29.59,25.27 31.85,27.51 31.85,29.39 v32.08,29.62
  Bottom 0.152: v32.51,41.15 32.66,41 33.22,40.44 33.22,36.09 34.72,34.59 34.72,33.25 33.72,32.24 U1.46 33.72,30.16 32.99,29.44 32.97,29.41 32.28,29.41 v32.08,29.62
FC_IMU_SCLK  (via drill 0.41)
  Top 0.152: JP2.3 29.92,46.99 31.06,45.85 31.06,45.09 31.11,45.03 31.17,44.98 31.17,43.43 31.98,42.62 33.81,42.62 34.39,42.04 v34.39,40.92 | U5.23 25.64,22.5 26.11,22.02 26.8,22.02 28.04,22.02 29.67,23.65 29.67,24.89 v32.66,27.86
  Bottom 0.152: v34.39,40.92 34.01,40.54 34.01,36.4 35.66,34.75 35.66,32.89 35.22,32.45 U1.49 35.2,31.58 35.2,30.35 32.92,28.07 v32.66,27.86
FC_JTAG_TCK  (via drill 0.41)
  Top 0.152: v31.69,6.54 31.69,5.14 JP4.5
  Top 0.203: FC_JTAG.1 31.62,17.21 v30.67,18.16
  Bottom 0.152: v31.69,6.54 31.3,6.92 31.3,15.3 31.22,15.39 U1.85 31.22,17.61 v30.67,18.16
FC_JTAG_TDI  (via drill 0.41)
  Top 0.152: v33.66,6.54 34.04,6.54 34.29,6.29 JP4.7
  Top 0.203: v30.71,20.19 32.51,18.39 32.94,18.39 34.11,17.22 34.11,16.47 FC_JTAG.5
  Bottom 0.152: U1.83 32.22,15.64 31.94,15.37 31.94,7.87 33.27,6.54 v33.66,6.54
  Bottom 0.203: U1.83 32.22,18.68 v30.71,20.19
FC_JTAG_TDO  (via drill 0.41)
  Top 0.203: v30.68,21.26 31.06,20.88 33.12,18.82 34.11,17.83 34.57,17.83 35.43,16.97 FC_JTAG.7 35.43,15.24 36.3,14.38 36.3,6.4 35.56,5.66 JP4.8
  Bottom 0.203: v30.68,21.26 30.71,21.26 32.72,19.25 U1.82
FC_JTAG_TMS  (via drill 0.41)
  Top 0.152: v32.96,4.19 32.96,2.6 JP4.6
  Top 0.203: FC_JTAG.3 32.89,16.95 v30.67,19.18
  Bottom 0.152: v32.96,4.19 32.96,6.29 31.72,7.53 31.62,7.62 31.62,15.49 31.72,15.59 U1.84 31.72,18.13 v30.67,19.18
FC_MAG_DRDY_L  (via drill 0.41)
  Top 0.152: v24.21,35.23 23.34,35.23 22.05,33.93 22.05,32.66 21.87,32.49 21.59,32.21 21.59,30.68 20.47,29.57 15.06,29.57 14.78,29.29 13.77,29.29 12.62,28.14 12.62,26.57 v11.91,25.86 | v12.01,23.65 11.89,23.65 11.53,24 U6.15
  Bottom 0.152: U1.34 27.72,32.68 27.3,33.1 27.3,34.95 27.13,35.13 24.31,35.13 v24.21,35.23 | v11.91,25.86 11.91,23.75 v12.01,23.65
FC_MEM_CLK  (via drill 0.41)
  Top 0.152: v13.84,2.54 JP3.4 | v12.88,18.92 12.9,18.92 15.01,21.03 17.17,21.03 17.65,21.51 17.65,23.98 17.93,24.26 17.93,28.52 18.64,29.23 20.57,29.23 21.92,30.58 21.92,32.08 22.55,32.72 22.55,32.97 v23.14,33.55
  Bottom 0.152: v13.84,2.54 14.52,3.22 J2.P5 14.52,7.2 14.28,7.44 13.72,8 13.72,13.54 14.61,14.43 U9.6 14.61,17.2 v12.88,18.92 | U1.28 24.72,32.16 24.84,32.28 24.84,32.89 24.21,33.53 23.16,33.53 v23.14,33.55
  Bottom 0.203: 14.52,15.73 U9.6
FC_MEM_FSS  (via drill 0.41)
  Top 0.152: v23.52,30.56 22.33,30.56 20.7,28.93 18.77,28.93 18.24,28.4 18.24,24.13 17.96,23.85 17.96,21.39 17.3,20.73 15.16,20.73 13.54,19.1 13.54,17.65 12.14,16.26 v9.93,16.26
  Bottom 0.152: U1.29 25.22,30.96 24.82,30.56 v23.52,30.56 | v9.93,16.26 8.94,16.26 U8.3
FC_MEM_MISO  (via drill 0.41)
  Top 0.152: JP3.5 v15.3,5.08
  VCC 0.152: v14.71,19.28 20.52,19.28 21.95,17.86 25.45,17.86 26.57,16.74 27.3,16.74 27.46,16.59 28.25,16.59 28.57,16.92 28.57,18.62 v27.61,19.53
  Bottom 0.152: v15.3,5.08 15.94,5.08 16.7,5.84 16.7,6.53 J2.P7 16.72,7.16 15.24,8.64 14.22,9.65 14.22,13.36 15.21,14.35 15.21,17.7 14.48,18.44 | 14.48,18.44 13.34,19.58 U9.2 | v14.71,19.28 14.71,18.67 14.48,18.44 | U1.30 25.72,27.22 26.52,26.42 26.52,22.38 27.61,21.29 v27.61,19.53
FC_MEM_MOSI  (via drill 0.41)
  Top 0.152: JP3.3 v12.38,5.08
  VCC 0.152: v28.78,19.63 28.78,18.87 28.96,18.69 28.96,16.84 28.37,16.26 27.33,16.26 27.15,16.43 26.39,16.43 25.3,17.53 21.79,17.53 20.37,18.95 17.25,18.95 v16.05,17.75
  VCC 0.203: v12.7,17.75 v16.05,17.75
  Bottom 0.152: J2.P3 12.38,6.49 v12.38,5.08 | U1.31 26.22,29.08 28.78,26.52 v28.78,19.63
  Bottom 0.203: J2.P3 12.32,7.34 12.7,7.72 12.7,11.15 12.32,11.53 11.71,12.14 | 11.71,12.14 11.68,12.14 | 11.71,12.14 11.53,12.32 11.53,14.55 11.51,14.58 11.51,17.04 11.76,17.3 12.24,17.3 v12.7,17.75 | v16.05,17.75 16.05,15.99 U9.5
FC_MEM_SEL
  Bottom 0.152: U1.11 21.42,22.88 20.93,23.37 20.93,23.77 20.62,24.08 18.87,24.08 17.73,25.22 15.57,25.22 12.72,22.38 12.72,19.86 11.53,18.67 10.69,18.67 9.55,17.53 8.94,17.53 U8.1
FC_PB2  (via drill 0.41)
  Top 0.152: JP4.12 40.64,5.71 38.92,7.43 38.92,16 v38.61,16.32
  Bottom 0.152: U1.72 37.84,19.38 37.97,19.24 38.04,19.24 38.1,19.18 38.8,18.48 38.8,18.22 38.8,16.51 v38.61,16.32
FC_PB3  (via drill 0.41)
  Top 0.152: JP4.11 39.37,6.35 38.48,7.24 38.48,14.92 v38.04,15.37
  Bottom 0.152: U1.73 37.96,18.88 38.48,18.35 38.48,18.1 38.48,17.14 37.85,16.51 37.85,15.56 v38.04,15.37
FC_PB4  (via drill 0.41)
  Top 0.152: v27.64,11.86 27.64,11.61 27.61,11.58 27.58,10.62 28.5,9.7 28.5,7.37 26.95,5.82 26.95,5.36 JP4.1
  Bottom 0.152: U1.92 27.72,15.59 28.13,15.18 28.19,15.11 28.19,14.03 27.88,13.72 27.88,12.1 v27.64,11.86
FC_PB5  (via drill 0.41)
  Top 0.152: v28.25,10.9 29.16,9.98 29.16,7.06 27.94,5.84 JP4.2
  Bottom 0.152: U1.91 28.22,15.53 28.51,15.24 28.51,13.91 28.38,13.78 28.38,11.04 v28.25,10.9
FC_PD0  (via drill 0.41)
  Top 0.152: v20.04,5.08 JP3.9
  Bottom 0.152: U1.1 22,10.19 20.8,8.99 20.57,8.76 20.57,5.56 v20.04,5.08
FC_PD1  (via drill 0.41)
  Top 0.152: v18.87,2.64 17.88,2.64 JP3.8
  Bottom 0.152: U1.2 21.48,18.38 21.29,18.19 21.29,17.75 20.37,16.84 20.27,16.74 20.27,6.43 18.87,5.03 v18.87,2.64
FC_PD2  (via drill 0.41)
  Top 0.152: v17.78,5.08 JP3.7
  Bottom 0.152: U1.3 21.49,18.88 20.95,18.34 20.95,17.88 19.96,16.89 19.96,6.58 18.47,5.08 v17.78,5.08
FC_PD3  (via drill 0.41)
  Top 0.152: v16.46,2.54 JP3.6
  Bottom 0.152: U1.4 21.43,19.38 20.88,18.82 20.65,18.59 20.65,18.03 19.61,16.99 19.61,14.5 18.44,13.34 18.44,5.92 18.26,5.74 17.3,5.74 16.46,4.9 v16.46,2.54
FC_PD4  (via drill 0.38)
  Top 0.152: v22.4,7.16 22.4,4.57 22.86,4.12 JP3.12
  Bottom 0.152: U1.97 25.22,16.79 25.12,16.89 23.52,16.89 23.29,16.66 22.94,16.31 22.94,9.8 22.58,9.45 22.58,9.02 22.61,8.99 22.61,7.85 | 22.61,7.85 22.61,7.87 | 22.61,7.85 22.48,7.72 22.4,7.64 v22.4,7.16
FC_PE4  (via drill 0.41)
  Top 0.152: v20.3,3.96 20.3,2.56 JP3.10
  Bottom 0.152: U1.95 26.22,16.71 25.43,17.5 23.24,17.5 22.66,16.92 22.33,16.59 22.33,10.06 21.89,9.63 21.89,8.89 22,8.76 22,8.2 21.31,7.52 20.9,7.11 20.9,4.57 v20.3,3.96
FC_PE5  (via drill 0.41)
  Top 0.152: v21.59,6.53 JP3.11
  Bottom 0.152: U1.96 25.72,16.75 25.27,17.2 23.39,17.2 22.96,16.76 22.63,16.43 22.63,9.93 22.28,9.58 22.28,8.91 22.3,8.89 22.3,8.08 22.05,7.82 21.59,7.37 v21.59,6.53
FC_PF0  (via drill 0.41)
  Top 0.152: v31.75,45.31 JP2.5
  Bottom 0.152: U1.40 30.72,42.25 31.27,42.8 31.27,44.83 v31.75,45.31
FC_PF1  (via drill 0.41)
  Top 0.152: v32,44.02 32.44,44.45 JP2.6
  Bottom 0.152: U1.41 31.22,32.31 31.04,32.49 31.04,42.04 32,43 v32,44.02
FC_PF2  (via drill 0.41)
  Top 0.152: v34.29,45.54 JP2.7
  Bottom 0.152: U1.42 31.72,32.27 31.37,32.61 31.37,41.86 32.61,43.1 32.69,43.18 32.69,43.94 v34.29,45.54
FC_PF3  (via drill 0.41)
  Top 0.152: v35.56,45.87 JP2.8
  Bottom 0.152: U1.43 32.22,32.22 31.7,32.74 31.7,41.63 33.07,43 33.07,43.87 34.11,44.91 35,44.91 35.56,45.47 v35.56,45.87
FC_PF4  (via drill 0.41)
  Top 0.152: v30.48,43 JP2.4
  Bottom 0.152: U1.39 30.22,32.5 30.38,32.66 30.4,32.69 30.4,42.93 v30.48,43
FC_PG2  (via drill 0.41)
  Top 0.152: v41.83,42.06 41.17,42.06 38.79,44.45 JP2.10
  Bottom 0.152: U1.60 37.97,25.38 38.15,25.2 41.66,25.2 42.14,25.68 43.26,26.8 43.26,30.1 44.2,31.04 44.2,32.13 41.83,34.49 v41.83,42.06
FC_PG3  (via drill 0.41)
  Top 0.152: JP2.9 36.83,46.48 37.39,45.92 v38.1,45.92
  Bottom 0.152: U1.59 37.9,25.88 38.28,25.5 41.48,25.5 41.99,26.01 42.9,26.92 42.9,30.18 43.89,31.17 43.89,31.98 41.68,34.19 41.5,34.37 41.5,41.22 40.87,41.86 40.87,42.8 41.53,43.46 42.09,43.46 42.75,44.12 42.75,44.63 41.81,45.57 38.46,45.57 v38.1,45.92
FC_PG4  (via drill 0.41)
  Top 0.152: JP4.10 38.1,13.65 v37.47,14.29
  Bottom 0.152: U1.74 38.01,18.38 38.1,18.29 38.16,18.22 38.16,17.78 38.16,17.27 37.47,16.57 37.47,15.68 37.4,15.56 37.4,14.35 v37.47,14.29
FC_PG5  (via drill 0.41)
  Top 0.152: v36.64,15.24 36.64,6.92 36.83,6.73 JP4.9
  Bottom 0.152: U1.75 37.44,16.99 37.15,16.7 37.15,15.75 v36.64,15.24
FC_PG6  (via drill 0.41)
  Top 0.152: v30.48,4.38 JP4.4
  Bottom 0.152: U1.87 30.22,15.68 29.84,15.3 29.84,7.56 30.54,6.86 30.67,6.73 30.67,4.57 v30.48,4.38
FC_PG7  (via drill 0.41)
  Top 0.152: v29.97,6.41 29.27,5.71 29.27,5.14 JP4.3
  Bottom 0.152: U1.88 29.72,15.62 29.53,15.43 29.53,6.86 v29.97,6.41
FC_PPM_IN  (via drill 0.41)
  Top 0.152: R31.1 v36.83,40.74
  Top 0.203: v36.83,40.74 37.54,41.45 37.54,41.95 R5.1
  VCC 0.152: v36.83,40.74 36.83,39.01 43.89,31.95 43.89,31.27 40.92,28.3 40.74,28.3 39.55,27.1 39.55,26.98 v38.86,26.29
  Bottom 0.152: U1.58 38.77,26.38 v38.86,26.29
FC_PPM_STATUS0  (via drill 0.41)
  Top 0.152: v28.73,30.02 28.73,30.33 R37.1 28.72,30.94 27.79,30.94 27.6,31.12 R9.2
  Bottom 0.152: U1.36 28.72,30.32 v28.73,30.02
FC_PPM_STATUS1  (via drill 0.41)
  Top 0.152: R32.1 29.82,29.29 29.52,28.98 v28.91,28.98 28.23,28.98 R8.1
  Bottom 0.152: U1.37 29.22,30.68 29.31,30.58 29.41,30.48 29.41,29.52 v28.91,28.98
FC_PWMOUT1
  Bottom 0.203: U1.16 20.22,25.38 20.19,25.4 19.43,25.4 18.92,25.91 17.53,27.3 17.53,28.7 18.16,29.34 18.16,32 17.91,32.26 17.02,33.15 16.15,33.15 U2.21
FC_PWMOUT2
  Bottom 0.203: U2.20 16.98,33.82 18.29,32.51 18.54,32.26 18.54,29.21 18.03,28.7 17.91,28.57 17.91,27.43 19.43,25.91 20.19,25.91 21.97,25.91 U1.17
FC_PWMOUT3
  Bottom 0.203: U1.18 20.23,26.38 19.47,26.38 18.41,27.43 18.29,27.56 18.29,28.45 18.92,29.08 18.92,32.64 18.67,32.89 17.14,34.42 16.18,34.42 U2.19
FC_PWMOUT4
  Bottom 0.203: U1.19 20.24,26.88 19.48,26.88 18.67,27.69 18.67,28.32 18.8,28.45 19.3,28.96 19.3,33.15 19.05,33.4 17.4,35.05 16.2,35.05 U2.18
FC_PWMOUT5  (via drill 0.41)
  VCC 0.152: v31.04,22.17 31.04,23.22 30.56,23.7 30.07,23.7 29.31,24.46 29.31,27.13 27.71,28.73 25.09,28.73 23.75,27.38 22.89,27.38 22.25,28.02 21.39,28.02 19.43,29.97 19.43,32.79 16.94,35.28 16.87,35.36 14.49,35.36 v14.48,35.37
  Bottom 0.152: U2.17 14.88,35.77 v14.48,35.37 | U1.79 34.22,18.23 31.45,21.01 31.45,21.77 v31.04,22.17
FC_PWMOUT6  (via drill 0.41)
  VCC 0.152: v32.03,22.17 32.03,22.68 30.71,24 30.23,24 29.64,24.59 29.64,27.3 27.89,29.03 24.97,29.03 23.62,27.69 23.04,27.69 22.58,28.14 22.58,30.71 20.78,32.51 17.02,36.27 16.87,36.42 14.52,36.42 v14.48,36.39
  Bottom 0.152: U2.16 14.52,36.42 v14.48,36.39 | U1.78 34.72,18.24 32.03,20.93 v32.03,22.17
FC_PWMOUT7  (via drill 0.41)
  VCC 0.152: v33.05,22.17 33.05,22.2 32.18,23.06 32.18,26.01 30.61,27.58 30.5,27.58 29.62,28.47 29.62,30.12 28.3,31.39 24.23,31.39 22.94,32.69 21.06,32.69 16.69,37.06 14.82,37.06 v14.48,37.4
  Bottom 0.152: U2.15 14.81,37.07 v14.48,37.4 | U1.77 35.22,18.32 33.02,20.52 33.02,22.15 v33.05,22.17
FC_PWMOUT8  (via drill 0.41)
  VCC 0.152: v33.05,23.19 32.92,23.19 32.49,23.62 32.49,26.16 30.38,28.27 29.92,28.73 29.92,30.28 28.47,31.73 25.2,31.73 24.92,32 24.92,32.94 24.49,33.38 24.26,33.38 23.42,34.21 20.02,34.21 16.74,37.49 15.4,37.49 v14.48,38.42
  Bottom 0.152: U2.14 15.17,37.72 v14.48,38.42 | U1.76 35.72,18.31 33.71,20.32 33.71,22.53 v33.05,23.19
FC_PWMOUT_ARM_L
  Bottom 0.203: U2.22 16.75,32.52 17.02,32.26 17.02,30.61 16.19,29.78 R26.1
FC_RESET_L  (via drill 0.41)
  Top 0.152: JP1.10 24.89,44.45 25.7,45.26 25.7,48.26 26.14,48.69 47.83,48.69 48.72,47.8 48.72,15.62 SW1.2
  Top 0.203: FC_JTAG.2 31.62,10.69 v32.89,9.42
  VCC 0.203: v32.89,9.42 v39.78,9.42
  Bottom 0.152: U1.63 38.02,23.88 38.18,24.03 38.41,24.26 41.86,24.26 43.03,23.09 43.05,23.06 43.05,22.45 42.75,22.15 42.75,13.53 R1.1
  Bottom 0.203: SW1.2 45.81,12.71 C4.1 R1.1 43.52,12.68 42.88,12.68 41.5,11.3 41.5,11.15 v39.78,9.42
FC_SD_PRESENT  (via drill 0.41)
  Top 0.203: v13.82,3.5 14.28,3.5 14.61,3.17 14.61,1.57 14.91,1.27 23.55,1.27 24.49,2.21 24.49,3.53 24.97,4.01 24.97,6.15 26.34,7.52 26.34,9.2 v24.92,10.62
  Bottom 0.152: U1.98 24.72,11.22 24.72,10.82 v24.92,10.62
  Bottom 0.203: J2.G1 13.77,3.55 v13.82,3.5
FC_SENSE_SCL  (via drill 0.41)
  Top 0.152: U7.8 24,15.35 R42.1 23.89,16.88 23.16,17.6 23.16,18.36 23.32,18.52 v23.32,19.07 24.05,19.07 25.2,20.22 26.7,20.22 30.45,23.98 v30.45,24.74 | v42.6,46.99 JP2.11 | v16.2,26.54 R41.2
  VCC 0.152: v23.32,19.07 23.27,19.07 21.11,21.23 19.71,21.23 18.54,22.4 16.71,22.4 15.42,23.7 15.42,25.76 v16.2,26.54
  Bottom 0.152: 38.25,24.56 38.07,24.38 U1.62 36.35,24.38 35.99,24.74 v30.45,24.74 | 42.27,24.56 42.39,24.69 42.27,24.56 | 38.25,24.56 42.27,24.56 | 38.25,24.56 42.27,24.56 | 42.27,24.56 42.6,24.89 42.62,24.89 43.99,26.26 43.99,29.92 44.83,30.76 44.83,32.38 44.15,33.07 42.44,34.77 42.44,40.66 43.64,41.86 43.64,44.22 42.6,45.26 v42.6,46.99
FC_SENSE_SDA  (via drill 0.41)
  Top 0.152: U7.7 25.27,15.33 R43.1 25.36,16.88 25.58,17.2 26.57,18.19 v26.57,18.54 26.57,19.63 31.37,24.43 v31.37,25.4 | JP2.12 41.88,44.45 42.88,43.46 v42.88,42.9
  Top 0.203: R40.2 16.2,22.35 v16.89,21.67
  VCC 0.203: v16.89,21.67 18.64,21.67 20.6,19.71 22.1,18.21 26.24,18.21 v26.57,18.54
  Bottom 0.152: v42.88,42.9 42.88,41.91 42.14,41.17 42.14,34.62 44.5,32.26 44.5,30.89 43.59,29.97 43.59,26.67 41.81,24.89 41.79,24.88 U1.61 36.34,24.88 36.12,25.09 31.67,25.09 v31.37,25.4
FC_USB0DM
  Bottom 0.152: U1.68 38.06,21.38 40.32,19.11 40.32,12.9 38.48,11.06 R7.1
FC_USB0DP
  Bottom 0.152: U1.69 38.12,20.88 40.01,18.99 40.01,13.27 37.72,10.99 37.08,10.35 R4.1
FC_USB0ID
  Bottom 0.152: U1.70 38.17,20.38 39.69,18.86 39.69,13.4 37.59,11.3 36.64,11.3 36.01,10.67 36.01,10.24 R6.1
FLASH_CS_L
  Bottom 0.203: U9.1 11.24,21.02 9.91,19.68 9.02,19.68 7.37,18.03 7.37,17.58 U8.6
GND  (via drill 0.38, 0.41)
  Top 0.152: U3.EXP 33.15,35.53 33.4,35.79 U3.28 | SPI_PPM.6 40.55,25.62 v41.1,26.16 | U6.11 9.9,22.84 9.58,23.16 9.14,23.16 8.91,22.94 8.91,22.39 U6.9
  Top 0.203: U5.11 24.09,27.93 24.11,28.19 24.11,29.28 C19.2 | D1.C v7.24,4.7
  Bottom 0.152: C1.2 26.27,14.82 26.72,15.27 U1.94 | U1.10 21.13,22.38 v20.9,22.15 | 33.05,30.58 33.2,30.73 33.2,31.6 | C6.2 34.03,33.19 33.22,32.38 33.22,31.57 | v32.89,30.28 32.89,30.33 33.22,30.66 33.22,31.55 33.25,31.57
  Bottom 0.203: U1.21 21.27,27.88 21.21,27.94 21.21,28.45 21.08,28.57 20.57,29.08 20.57,29.21 | C13.2 20.94,20.46 21.08,20.32 21.94,20.32 U1.6
  other vias: 8.26,21.72 20.19,30.23 20.83,20.57 30.54,12.51 32.89,14.67 17.75,10.26 24.33,34.24 26.92,10.57 20.98,16.51 26.82,17.45 16.99,23.24 8.38,15.42 14.73,8.08 35.23,14.35 35.84,22.99 41.53,18.11 42.39,22.76 20.29,42.09 22.25,35.15 8.2,39.52 4.7,31.01 32.51,40.03 15.49,18.62 41.45,33.43 28.6,34.44 27.1,30.48 28.02,23.72 26.42,21.18 23.55,29.54 33.27,25.93 35.89,27.64 6.05,11.38 17.45,38.38 9.78,42.75 8.86,44.5 22.4,43.71 35.13,41.91 33.99,10.54 35.61,6.73 17.2,13.56 20.24,23.22
  pour Bottom: 0.64,48.9 0.64,-2.54 48.9,-2.54 48.9,48.9
  pour GND: 0.64,48.9 48.9,48.9 48.9,-6.99 0.64,-6.99
  pour Top: 0.64,48.9 48.9,48.9 48.9,-4.45 0.64,-4.45
GNDX
  Bottom 0.203: U1.53 39.02,28.88 C11.2 C7.2
GPS_RX  (via drill 0.41)
  Top 0.152: JP1.6 15.24,44.93 15.85,45.54 16.82,45.54 17.48,46.2 17.48,47.57 18.14,48.23 22.63,48.23 23.65,47.22 23.65,46.71 v24.77,45.59
  Bottom 0.152: U1.25 22,33.83 23.04,34.87 23.04,40.28 24.77,42.01 GPS.P3 v24.77,45.59
GPS_TX  (via drill 0.41)
  Top 0.152: JP1.7 16.51,47.47 17.6,48.56 23.32,48.56 v24.82,47.07
  Bottom 0.152: U1.24 22.67,29.38 22.81,29.52 22.81,30.05 22.33,30.53 22.33,33.71 23.39,34.77 23.39,40.13 25.81,42.55 25.96,42.7 25.96,43.63 GPS.P2 26.01,45.87 v24.82,47.07
ISENSE1
  Bottom 0.152: U1.90 28.72,15.48 28.91,15.29 28.91,10.63 R48.2
ISENSE2
  Bottom 0.152: U1.89 29.22,9.55 R47.2
ISENSE3  (via drill 0.41)
  Top 0.152: v23.7,20.12 23.39,20.12 22.61,19.33 22.61,17.35 22.86,17.09 22.91,17.04 22.91,10.16 v23.55,9.53
  Bottom 0.152: v23.55,9.53 23.55,8.73 R51.2 | U1.12 23.05,23.38 23.7,22.73 v23.7,20.12
ISENSE4
  Bottom 0.152: U1.100 23.75,16.12 23.75,15.37 23.88,15.24 23.88,10.29 24.51,9.65 24.51,9.18 R50.2
ISENSE5V
  Bottom 0.152: U1.99 24.26,16.12 24.26,11.05 24.26,10.52 24.26,10.34 24.77,9.83 24.99,9.63 25.26,9.63 R49.2 25.74,9.03
MAG_SCL
  Top 0.203: U6.1 13.8,25.12 R38.1 R41.1
MAG_SDA
  Top 0.203: U6.16 12.33,24.5 13.08,23.75 R39.1 R40.1
N$1
  Top 0.203: PWMIN.3 44.2,26.29 44.2,26.68 R18.2
N$2
  Top 0.203: PWMIN.4 44.58,28.45 44.21,28.45 R19.2
N$3
  Top 0.203: R20.2 45.09,30.48 PWMIN.5
N$4
  Top 0.203: PWMIN.6 45.59,32.51 R21.2
N$5
  Top 0.203: PWMIN.7 45.59,33.66 44.96,34.29 R22.2
N$6
  Top 0.203: R23.2 PWMIN.8
N$7
  Top 0.203: PWMIN.9 45.47,38.73 44.83,38.1 R24.2
N$8
  Top 0.203: R25.2 45.72,40.01 PWMIN.10
N$9
  Bottom 0.203: PWMOUT.3 4.19,25.15 4.19,26.67 4.7,27.18 R10.2
N$10
  Bottom 0.203: R11.2 5.08,28.83 4.83,28.57 4.32,28.07 4.32,27.81 PWMOUT.4
N$11
  Bottom 0.203: PWMOUT.5 3.94,28.57 4.19,28.83 4.19,29.46 5.21,30.48 R12.2
N$12
  Bottom 0.203: R13.2 4.95,32.26 3.81,31.11 PWMOUT.6
N$13
  Bottom 0.203: R14.2 4.57,34.04 4.19,33.66 PWMOUT.7
N$14
  Bottom 0.203: R15.2 4.32,35.81 3.94,36.2 PWMOUT.8
N$15
  Bottom 0.203: PWMOUT.9 4.56,38.73 R16.2
N$16
  Bottom 0.203: R17.2 5.7,39.64 4.06,41.27 PWMOUT.10
N$17
  Bottom 0.203: U1.8 20.11,21.38 L1.1 19.77,22.71 C14.2
N$18
  Bottom 0.152: C9.1 30.54,15.43 30.67,15.56 30.67,16.11 U1.86 30.73,16.17 30.73,17.14 29.72,18.16 U1.38
  Bottom 0.203: U1.38 C12.1
N$19
  Bottom 0.203: U1.54 39.68,28.38 C11.1 41.24,28.31 Y1.P$2
N$20
  Bottom 0.203: U2.2 9.78,31.87 9.53,31.62 9.53,30.48 9.53,30.46 R27.2
N$21
  Bottom 0.203: U1.52 38.14,29.38 39.01,30.25 39.01,31.16 C7.1 40.73,31.89 Y1.P$1
N$22
  Bottom 0.152: U1.50 35.72,32.47 36.52,33.27 R2.1
N$23
  Top 0.305: PWMIN.1 46.16,19.24 R54.1
N$24
  Bottom 0.203: U1.65 38.37,22.88 39.12,23.62 40.27,23.62 Y2.P$1
N$25
  Bottom 0.203: U1.66 38.71,22.38 39.24,21.84 40.27,21.84 Y2.P$3
N$26
  Top 0.305: PWMOUT.1 2.54,16.89 2.54,16.42 R55.1
N$27
  Bottom 0.152: R6.2 35.56,7.92 36.93,6.55 36.93,4.89 U12.ID
N$28
  Top 0.203: R3.2 7.24,7.37 D1.A
N$29
  Bottom 0.152: U12.D+ 37.59,7.29 37.08,7.8 R4.2
N$30
  Bottom 0.152: ISENSE.P6 28.91,6.83 28.7,7.04 R47.1
N$31
  Bottom 0.152: ISENSE.P5 27.66,6.79 27.3,7.14 R48.1
N$32
  Top 0.203: D2.A 38.34,38.45 R35.2
N$33
  Top 0.152: C20.1 24.07,22.89 U5.20
N$34
  Top 0.203: U5.10 24.6,28.52 C19.1
N$35
  Top 0.203: C21.1 10.3,20.81 9.4,21.72 U6.10
N$36
  Top 0.203: C22.1 8,19.3 7.49,19.81 7.49,22.73 7.75,22.99 8.27,22.99 U6.8
N$37
  Top 0.203: U6.12 10.4,21.98 11.05,21.34 11.05,19.68 10.67,19.3 C22.2
N$38
  Bottom 0.203: R45.2 R44.1 R46.1
N$39
  Bottom 0.203: GPS.P1 27.27,42.47 R53.1 R52.1
N$40
  Top 0.203: R57.1 21.34,36.36 U4.1
N$41
  Top 0.305: U10.5 15.11,8.89 14.73,9.27 14.73,12.05 Q2.1
N$42
  Top 0.203: R57.2 19.98,33.13 BZR.P$1
N$43
  Top 0.305: R59.2 R58.1 23.5,40.88 23.5,40.13 23.18,39.81 U4.4
N$44
  Bottom 0.152: ISENSE.P4 26.41,6.56 25.91,7.06 R49.1
N$45
  Bottom 0.152: ISENSE.P3 25.16,6.47 24.66,6.96 R50.1
N$46
  Bottom 0.152: ISENSE.P2 23.91,6.34 23.65,6.6 23.57,6.6 23.42,6.76 R51.1
N$49
  Bottom 0.152: U12.D- 38.24,7.89 38.48,8.13 R7.2
PC7_LED
  Top 0.203: U3.22 36.32,35.04 D2.C
PPM_HWB
  Top 0.152: U3.13 33.4,31.12 33.73,30.73 33.73,30 33.38,29.64 33.38,27.33 34.04,26.67
  Top 0.203: 34.04,26.67 34.04,22.91 38.15,18.8 39.8,18.8 41.07,17.53 41.22,17.37 41.94,17.37 42.39,17.83 42.42,17.86 42.42,21.46 41.53,22.35 41.53,23.6 41.83,23.9 43.65,23.9 HWB.1
PPM_OUT
  Top 0.203: U3.23 35.92,35.54 36.07,35.69 36.07,36.32 PPM.TP R31.2
PPM_PD0
  Top 0.152: U3.6 30.01,33.54 28.83,32.36 R37.2
PPM_PD1
  Top 0.152: U3.7 30.3,33.04 29.84,32.59 R32.2
PPM_RST  (via drill 0.41)
  Top 0.152: 37.35,29.52 SPI_PPM.5 | v35.46,37.49 35.46,38.44 R29.1
  Top 0.203: U3.24 35.45,38.45 R29.1 | v38.28,30.68 38.28,29.87 37.92,29.52 37.35,29.52
  Bottom 0.203: v38.28,30.68 38.28,34.67 v35.46,37.49
PPM_RX  (via drill 0.41)
  Top 0.152: U3.8 30.85,32.07 30.53,31.75 30.53,29.84 30.53,29.34 30.1,28.91 30.1,28.55 29.86,28.31 28.99,28.31 28.25,28.31 27.81,28.8 25.91,28.8 25.81,28.91 25.81,30.81 25.27,31.34 25.27,32.49 24.51,33.25 23.8,33.25 22.99,32.44 v22.99,31.6
  Bottom 0.152: v22.99,31.6 U1.26
PPM_TX  (via drill 0.41)
  Top 0.152: U3.9 31.4,31.8 30.84,31.24 30.84,29.69 30.84,29.18 30.45,28.8 30.45,28.4 30.04,27.98 29.12,27.98 28.14,27.98 28.11,27.98 27.58,28.5 25.68,28.5 25.5,28.68 25.5,30.68 24.97,31.22 24.97,31.85 v24.21,32.61
  Bottom 0.152: v24.21,32.61 24.21,31.61 U1.27
PWMIN1
  Top 0.152: 38.18,26.95 38.18,26.92 39.42,26.92 39.65,26.92 R18.1 | 33.9,27.57 33.9,28.97 34.04,29.11 34.04,30.91 33.88,31.06 33.88,31.98 U3.14
  Top 0.203: 33.9,27.57 34.52,26.95 38.18,26.95 | 42.53,27.05 R18.1 42.48,26.75
PWMIN2
  Top 0.203: U3.15 34.4,31.52 34.67,31.24 35.69,31.24 35.94,30.99 35.94,29.63 SPI_PPM.3 36.07,28.4 36.27,28.19 38.35,28.19 38.86,28.7 R19.1
PWMIN3  (via drill 0.41)
  Top 0.152: SPI_PPM.4 36.07,24.23 v35.81,23.98
  Top 0.203: U3.16 41.15,31.99 R20.1 42.66,31 v43.16,31.5
  VCC 0.152: v43.16,31.5 43.13,31.47 38.84,31.47 38.08,31.47 35.81,29.21 35.81,28.45 35.81,28.42 36.04,28.42 36.55,27.91 36.55,24.71 v35.81,23.98
PWMIN4  (via drill 0.41)
  Top 0.203: U3.17 40.45,32.54 | 40.45,32.54 42.76,32.54 R21.1 | v40.32,33.15 40.32,32.67 40.45,32.54 | SPI_PPM.1 v34.8,27.88
  VCC 0.152: v34.8,27.88 34.8,28.65 37.95,31.8 38.98,31.8 v40.32,33.15
PWMIN5
  Top 0.203: U3.18 39.26,33.04 40.51,34.29 R22.1
PWMIN6
  Top 0.203: U3.19 39.13,33.54 40.64,35.05 40.64,35.69 41.15,36.2 R23.1
PWMIN7
  Top 0.203: U3.20 38.99,34.04 40.01,35.05 40.01,37.34 40.77,38.1 R24.1
PWMIN8
  Top 0.203: U3.21 38.86,34.54 39.37,35.05 39.37,37.72 41.66,40.01 R25.1
PWMOUT1
  Bottom 0.203: U2.3 9.41,32.52 9.27,32.38 9.02,32.13 9.02,29.2 R10.1
PWMOUT2
  Bottom 0.203: U2.4 9.3,33.17 8.64,32.51 8.64,31.37 8,30.73 8,29.83 R11.1
PWMOUT3
  Bottom 0.203: U2.5 9.19,33.82 8.89,33.53 8.13,32.77 8.13,31.61 R12.1
PWMOUT4
  Bottom 0.203: U2.6 9.07,34.47 7.87,33.15 7.37,32.64 7.38,32.64 R13.1
PWMOUT5
  Bottom 0.203: U2.7 8.83,35.12 7.75,34.04 R14.1
PWMOUT6
  Bottom 0.203: U2.8 7.04,35.77 R15.1
PWMOUT7
  Bottom 0.203: U2.9 8.17,36.42 R16.1
PWMOUT8
  Bottom 0.203: U2.10 9.3,37.07 R17.1
RADIO_RX  (via drill 0.38)
  Top 0.152: JP1.3 12,46.99 13.46,45.53 13.46,42.93 13.46,42.24 v13.65,42.05 v13.65,42.04
  Bottom 0.152: U1.15 21.35,24.88 21.21,25.02 19.3,25.02 17.14,27.18 17.14,27.94 16,29.08 13.84,29.08 13.65,29.27 v13.65,42.04
RADIO_TX  (via drill 0.41)
  Top 0.152: v12.7,41.21 v12.71,41.22 12.71,42.35 JP1.4
  Bottom 0.152: U1.14 21.41,24.38 21.08,24.7 19.18,24.7 18.73,25.15 16.83,27.05 16.83,27.81 16.57,28.07 15.88,28.77 13.72,28.77 13.34,29.15 13.34,40.58 v12.7,41.21
SD_CS_L
  Bottom 0.203: J2.P2 11.22,7.96 7.62,11.56 7.62,15.49 7.37,15.75 7.37,16.2 U8.4
USB_EPEN  (via drill 0.41)
  Top 0.203: Q3.1 7.45,10.96 4.06,14.35 4.06,25.3 6.91,28.14 8.43,29.67 14.68,29.67 16.1,31.09 v20.9,31.09
  Top 0.305: R60.1 8.88,9.67 8.64,9.91 8.64,10.9 Q3.1
  Bottom 0.203: U1.23 21.39,28.88 21.26,29.01 21.26,30.73 v20.9,31.09
USB_POWER_CONN_L
  Top 0.305: R56.1 20.59,13.19 21.08,12.7 21.08,11.32 Q1.1 20.04,10.16 19.3,10.16 17.08,7.94 U10.4
VBATT  (via drill 0.38)
  VCC 0.203: v21.79,3.43 21.54,3.17 20.73,3.17 19.3,1.75 8.87,1.75 6.5,4.12 6.5,4.95 2.64,8.81 2.64,12.85 VBATTSENSE.1
  Bottom 0.203: R44.2 2.56,12.94 VBATTSENSE.1 | ISENSE.P1 22.66,4.29 v21.79,3.43
VBATTSENSE
  Bottom 0.152: U1.13 21.44,23.88 20.93,24.38 19.02,24.38 18.41,24.99 17.96,25.45 17.86,25.55 15.42,25.55 12.85,22.99 12.39,22.53 11.76,22.53 9.3,20.07 8.87,20.07 7.16,18.36 6.48,18.36 5.79,17.68 5.15,17.03 R46.2
VUCAP
  Top 0.203: U3.27 33.9,38.33 C16.1
VUSB  (via drill 0.38)
  Top 0.406: F1.2 27.69,7.29 26.8,6.4 26.11,6.4 25.7,5.99 25.7,2.11 26.54,1.27 41.15,1.27 41.58,1.7 41.58,4.85 v41.55,4.88
  Bottom 0.406: v41.55,4.88 U12.VBUS
VUSB_F  (via drill 0.41)
  Top 0.305: Q3.2 11.56,10.96 v11.58,10.95 | v21.36,8.51 21.06,8.51
  Top 0.406: F1.1 v21.36,8.51 21.06,8.51 20.74,8.51 Q1.3
  VCC 0.152: v34.19,8.48 21.39,8.48 v21.36,8.51
  VCC 0.305: v11.58,10.95 17.27,10.95 17.4,11.07 18.19,11.07 18.21,11.05 19.36,9.91 19.96,9.91 v21.36,8.51
  Bottom 0.152: U1.71 38.21,19.88 39.37,18.72 39.37,14.58 37.36,12.57 35.92,11.12 35.64,11.12 34.77,10.26 34.77,9.07 v34.19,8.48
XT1
  Top 0.152: 26.2,37.78 28.12,37.78 Y3.3
  Top 0.203: 26.2,37.78 R28.2 | Y3.3 28.19,39.35 R30.1
XT1R
  Top 0.203: R30.2 29.48,39.23 30.23,38.48 30.23,36.66 U3.1
XT2
  Top 0.203: U3.2 28.36,35.54 Y3.1 28.14,35.43 26.67,35.43 26.3,35.8 R28.1

## Text on the board
Top: QM4-FC | REV 1
Bottom: QM4-FC | REV 1
tPlace: VBAT
tNames: U5
tDocu: 8 | 8 | 7 | 7 | 6 | 6 | 5 | 5 | 4 | 4 | 3 | 3 | 2 | 2 | 1 | 1 | - | - | +X | + | + | +Y | QuadM4 | Flight Computer | Rev 1
bDocu: Collin Boots | RESET